# EAGLE board control (EAGLE 9.6.1), part 1 of 2
VERSION: v3.4
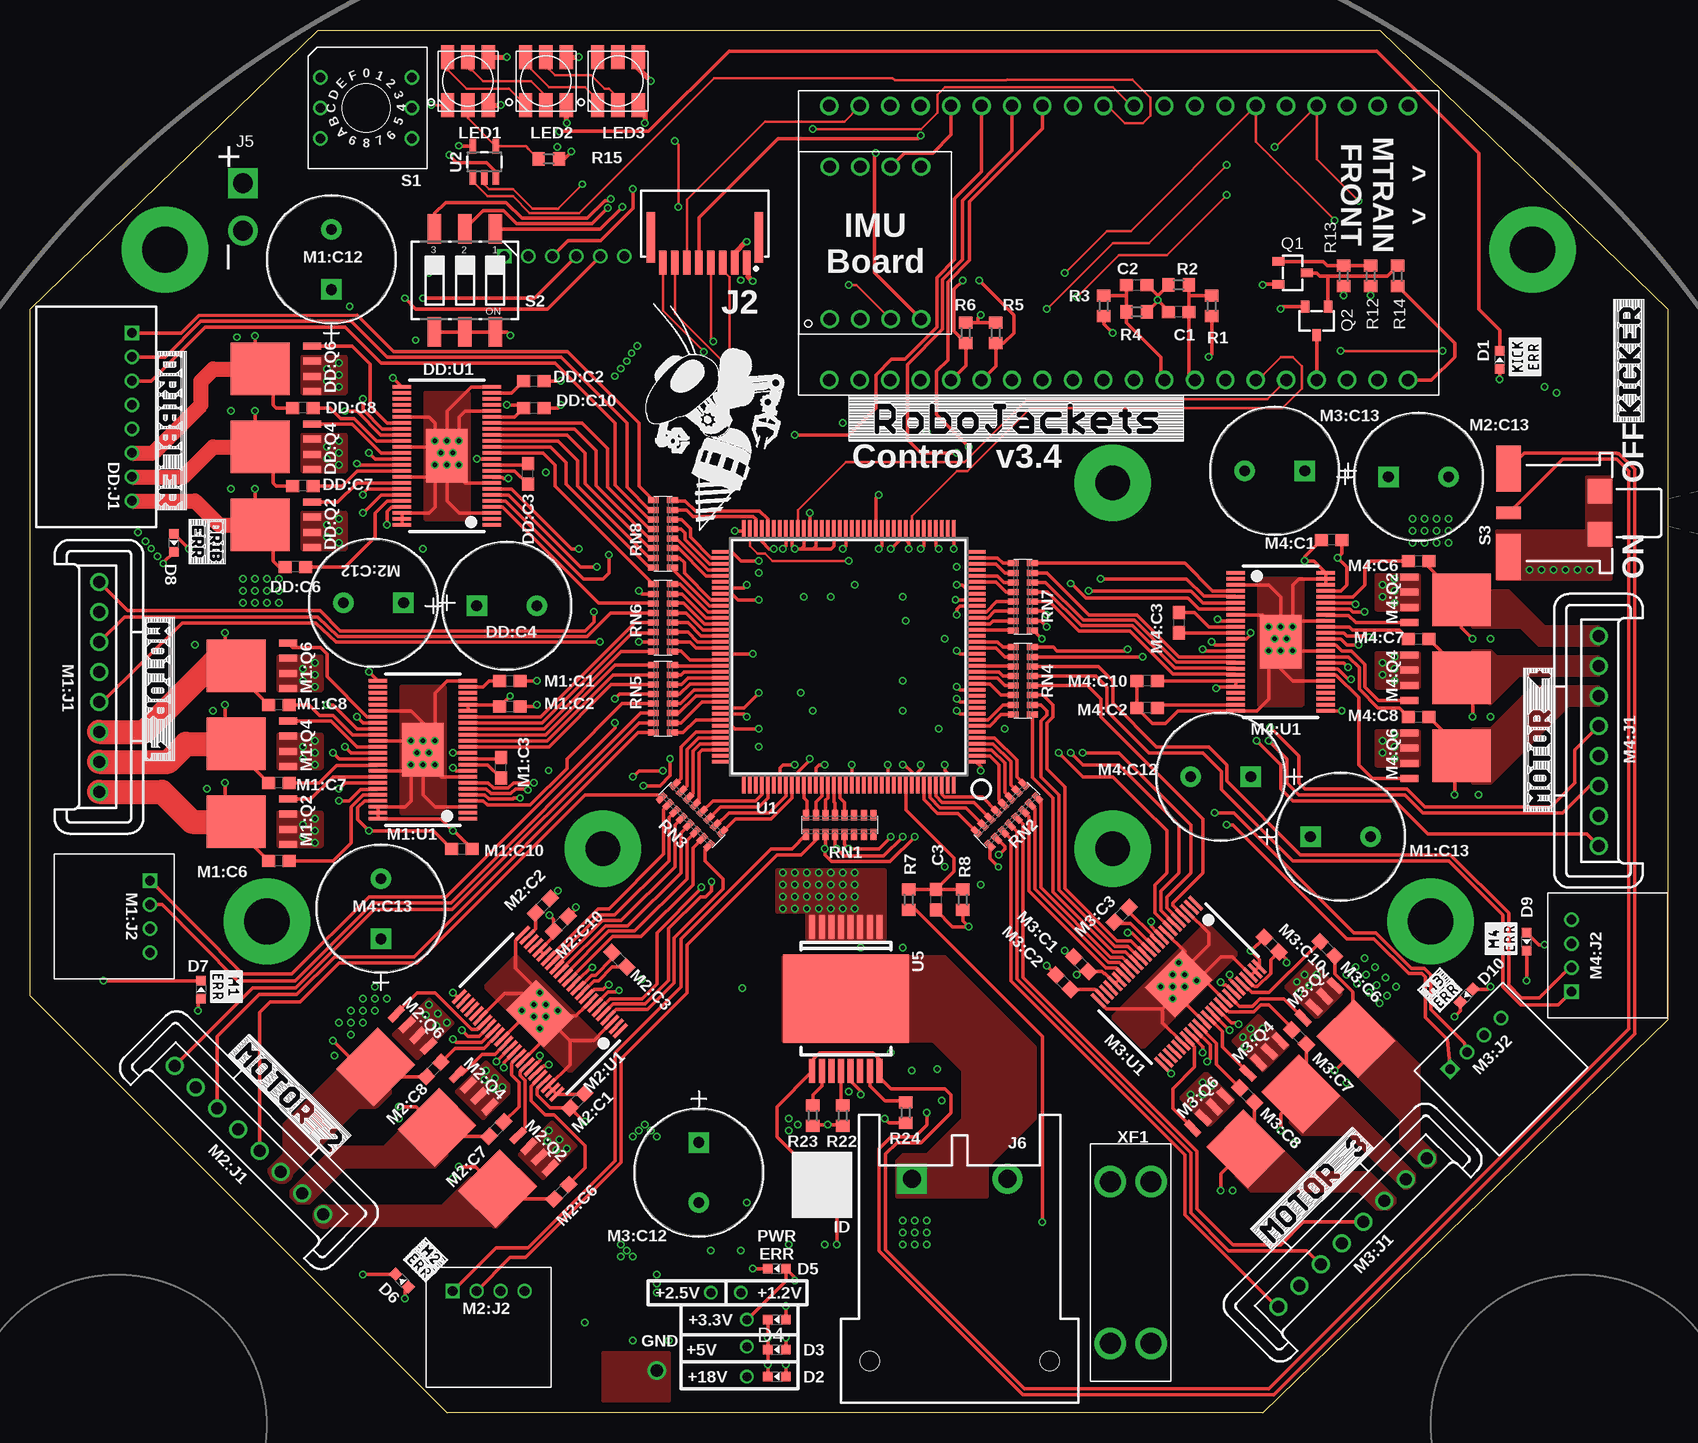
[diagram p0: board, top side]
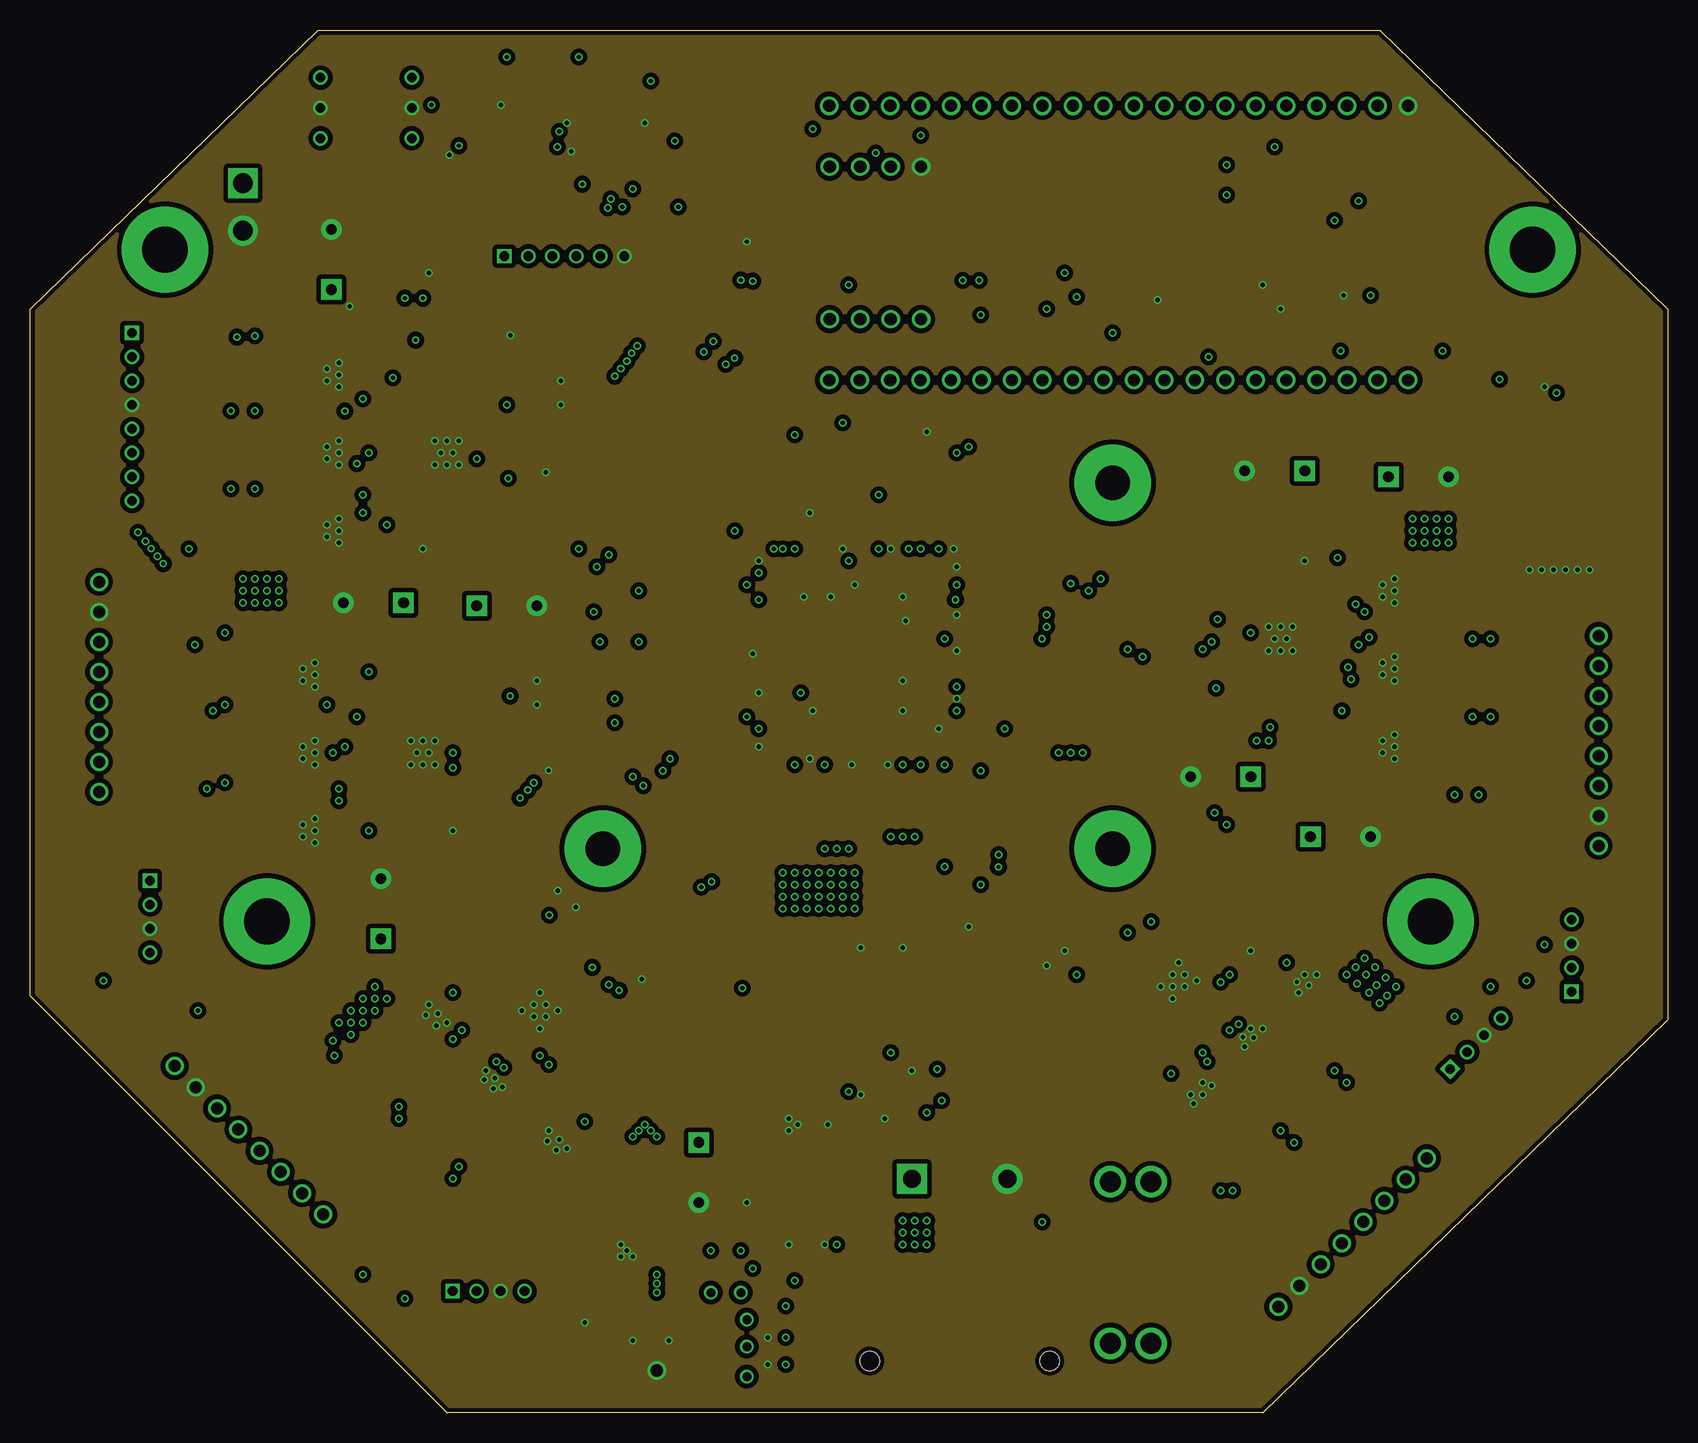
[diagram p1: board, inner layer GND]
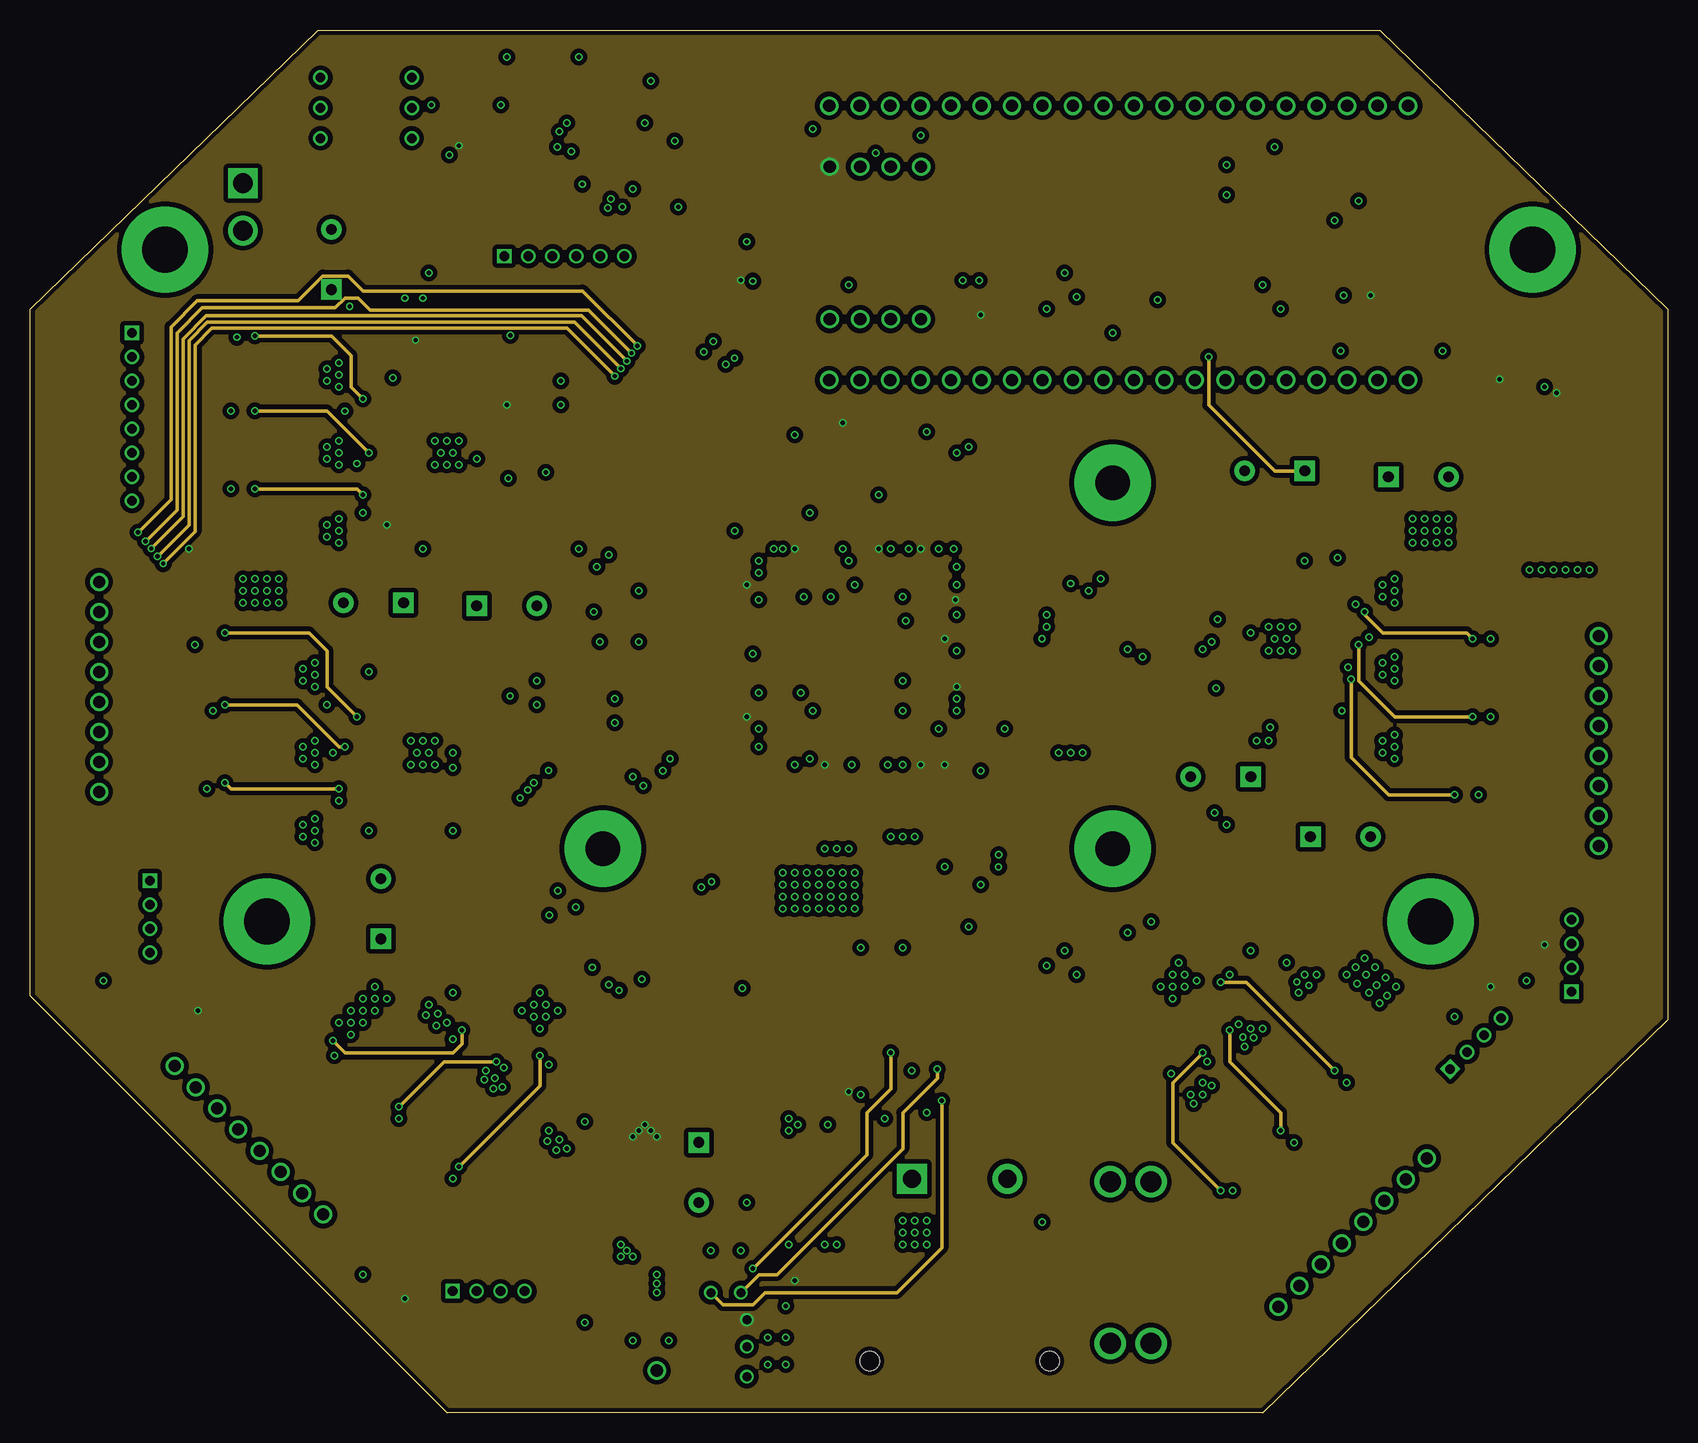
[diagram p2: board, inner layer 3v3]
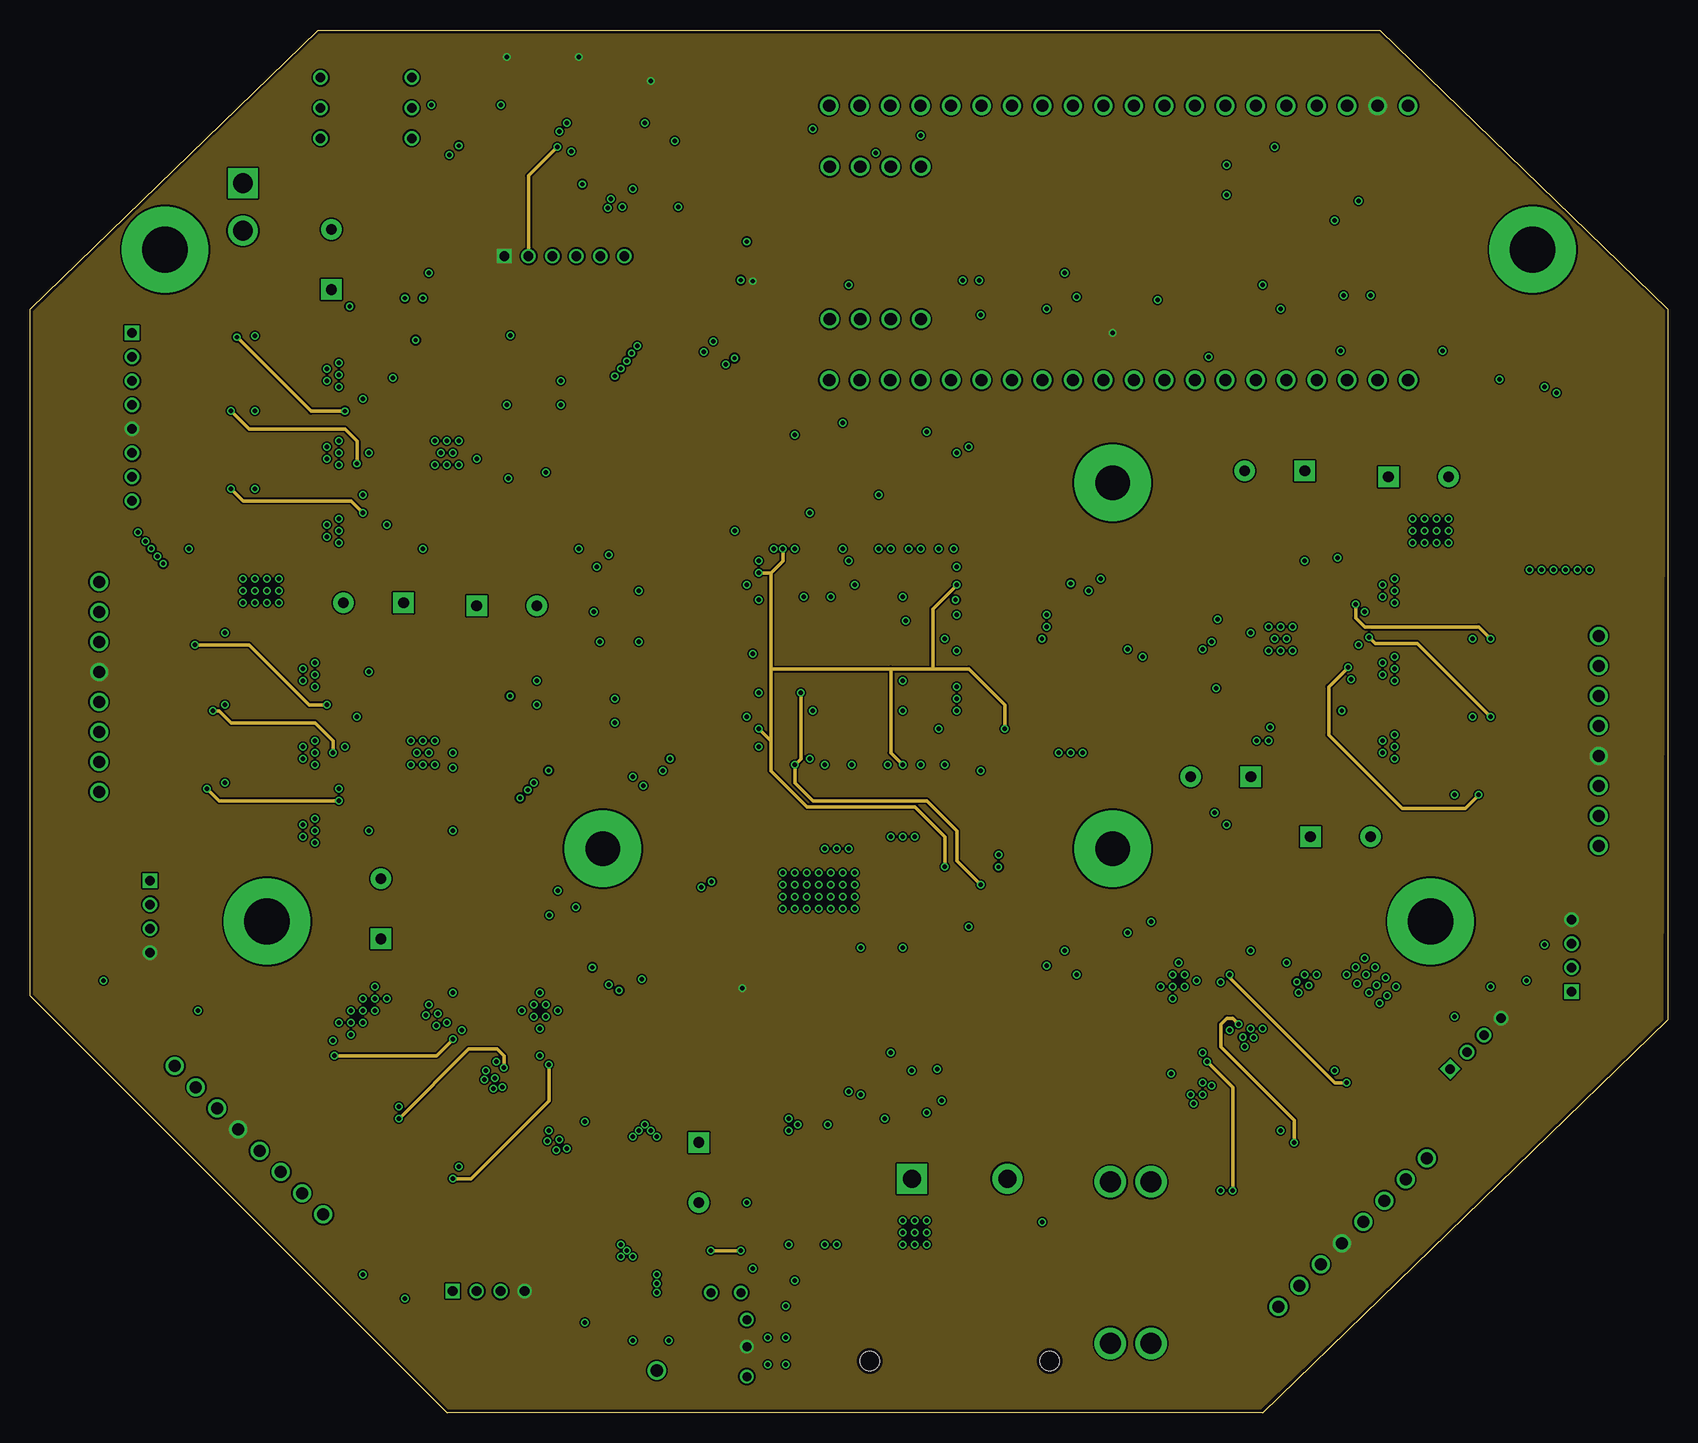
[diagram p3: board, inner layer 5v]
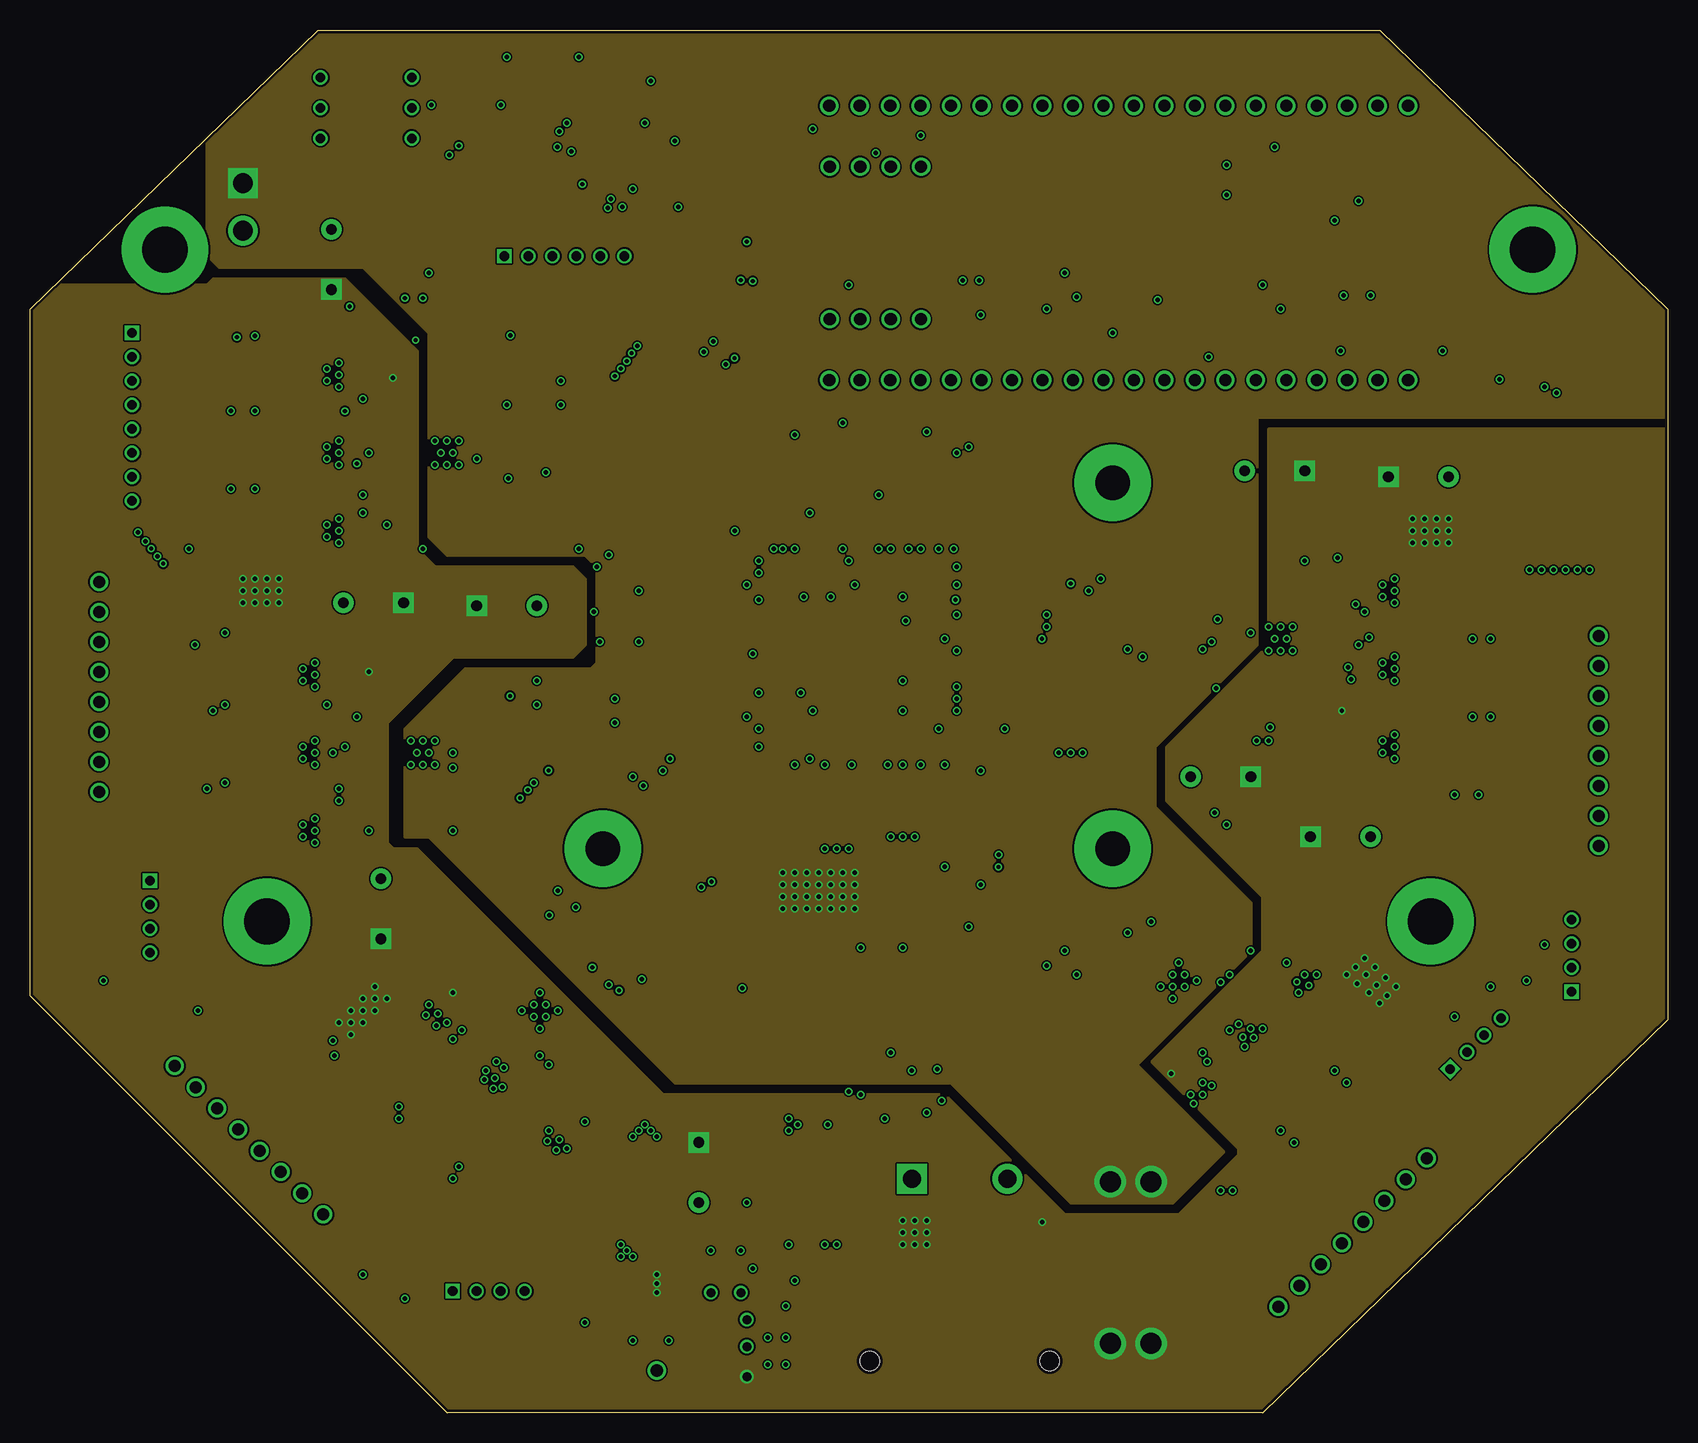
[diagram p4: board, inner layer Vbatt]
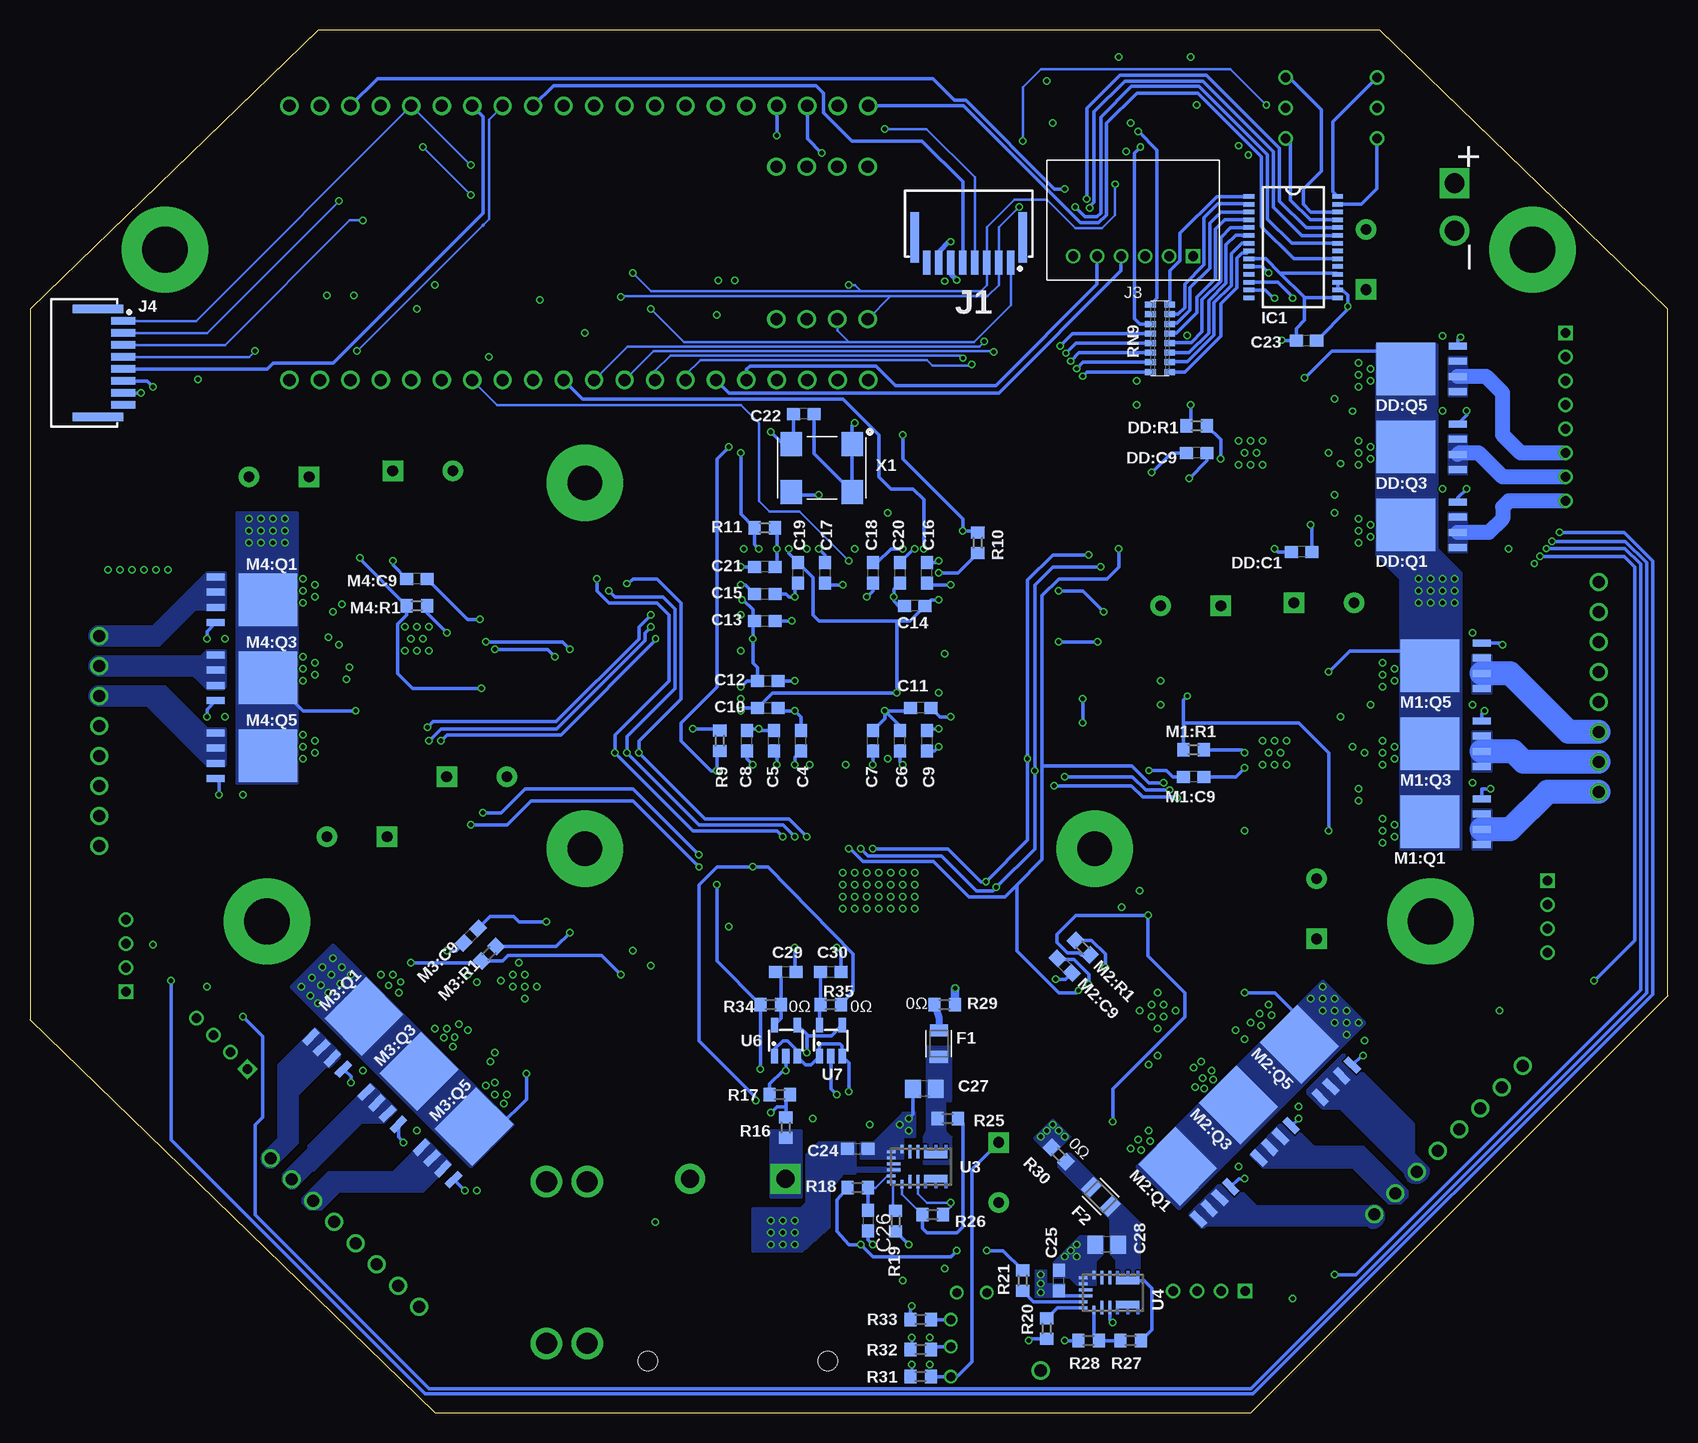
[diagram p5: board, bottom side, seen from below]

Size 136.5 x 115.25 mm. Coordinates in mm from the lower left corner, seen from the top.
Outline: 102.75,0 34.75,0 0,34.75 0,92 24,115.25 112.5,115.25 136.5,92 136.5,32.75 102.75,0
Copper layers (1+2*3+14*15+16): Top 0.018mm / dielectric 0.2mm / GND 0.035mm / dielectric 0.36mm / 3v3 0.035mm / dielectric 0.3mm / 5v 0.035mm / dielectric 0.15mm / Vbatt 0.035mm / dielectric 0.2mm / Bottom 0.018mm
Design rules "eC_6Layer_PClass6_BaseCopperO18-I35_eCDefault *": minimum track width 0.15mm, minimum drill 0.35mm, track to track 0.15mm, track to pad 0.15mm, pad to pad 0.15mm, via to via 0.15mm, smd to smd 0mil, copper to edge 0.25mm, drill to drill 0.35mm, minimum pad ring 0.175mm, minimum via ring 0.125mm, stop-mask expansion 0mil, vias tented up to drill 0.45mm, thermal gap 0.2mm

## Footprints (pad centres in the part's own frame; a part is rotated, then mirrored left to right if it is on the bottom)
C0603 = smd 1.1 x 1: 1 -0.85,0; 2 0.85,0
C0805 = smd 1.3 x 1.5: 1 -0.95,0; 2 0.95,0
CHIP-LED0603 = smd 0.8 x 0.8: A 0,-0.75; C 0,0.75
CAP_PAN_10X12.5 = drill 0.914 pad 1.676 square: 1 -5.004,0 | drill 0.914 pad 1.676: 2 0,0
2MM-8-H = drill 0.8 square: 1 -7,0 | drill 0.8: 2 -5,0; 3 -3,0; 4 -1,0; 5 1,0; 6 3,0; 7 5,0; 8 7,0
PQFN_5X6_E = smd 1.5 x 0.6: 1 -3.02,1.905; 2 -3.02,0.635; 3 -3.02,-0.635; 4 -3.02,-1.905 | smd 4.895 x 4.41: 5678 1.323,0
R0603 = smd 1 x 1.1: 1 -0.85,0; 2 0.85,0
TSSOP-48_PAD = smd 0.3 x 1.55: 1 -5.75,-3.75; 2 -5.25,-3.75; 3 -4.75,-3.75; 4 -4.25,-3.75; 5 -3.75,-3.75; 6 -3.25,-3.75; 7 -2.75,-3.75; 8 -2.25,-3.75; 9 -1.75,-3.75; 10 -1.25,-3.75; 11 -0.75,-3.75; 12 -0.25,-3.75; 13 0.25,-3.75; 14 0.75,-3.75; 15 1.25,-3.75; 16 1.75,-3.75; 17 2.25,-3.75; 18 2.75,-3.75; 19 3.25,-3.75; 20 3.75,-3.75; 21 4.25,-3.75; 22 4.75,-3.75; 23 5.25,-3.75; 24 5.75,-3.75; 25 5.75,3.75; 26 5.25,3.75; 27 4.75,3.75; 28 4.25,3.75; 29 3.75,3.75; 30 3.25,3.75; 31 2.75,3.75; 32 2.25,3.75; 33 1.75,3.75; 34 1.25,3.75; 35 0.75,3.75; 36 0.25,3.75; 37 -0.25,3.75; 38 -0.75,3.75; 39 -1.25,3.75; 40 -1.75,3.75; 41 -2.25,3.75; 42 -2.75,3.75; 43 -3.25,3.75; 44 -3.75,3.75; 45 -4.25,3.75; 46 -4.75,3.75; 47 -5.25,3.75; 48 -5.75,3.75 | smd 4.42 x 3.483: PAD 0,0
FUSC2113X75 = smd 1 x 1.52: 1 -1.1,0 | smd 1 x 1.5: 2 1.1,0
SSOP-28 = smd 0.9 x 0.38: 1 -3.7,4.225; 2 -3.7,3.575; 3 -3.7,2.925; 4 -3.7,2.275; 5 -3.7,1.625; 6 -3.7,0.975; 7 -3.7,0.325; 8 -3.7,-0.325; 9 -3.7,-0.975; 10 -3.7,-1.625; 11 -3.7,-2.275; 12 -3.7,-2.925; 13 -3.7,-3.575; 14 -3.7,-4.225; 15 3.7,-4.225; 16 3.7,-3.575; 17 3.7,-2.925; 18 3.7,-2.275; 19 3.7,-1.625; 20 3.7,-0.975; 21 3.7,-0.325; 22 3.7,0.325; 23 3.7,0.975; 24 3.7,1.625; 25 3.7,2.275; 26 3.7,2.925; 27 3.7,3.575; 28 3.7,4.225
HFW8R-1ST = smd 0.6 x 2: 1 -3.5,3.25; 2 -2.5,3.25; 3 -1.5,3.25; 4 -0.5,3.25; 5 0.5,3.25; 6 1.5,3.25; 7 2.5,3.25; 8 3.5,3.25 | smd 0.7 x 4.2: LEG1 -4.5,1.15; LEG2 4.5,1.15
2MM-6-H = drill 0.8 square: 1 -4,0 | drill 0.8: 2 -2,0; 3 0,0; 4 2,0; 5 4,0; 6 6,0
B2P_SMALL = drill 1.65: 1 0.02,0 | drill 1.65 square: 2 3.98,0
DF22-2-H = drill 1.5 pad 2.5 square: 1 3.96,0 | drill 1.5 pad 2.5: 2 -3.96,0 | hole 1.6: -7.5,15.2; 7.5,15.2
MTRAIN-KIT = drill 1.02: !RST 11.43,16.51; GND -11.43,24.13; NC 11.43,19.05; P$3 -11.43,19.05; P$4 -11.43,16.51; P$5 -11.43,13.97; P$6 -11.43,11.43; P$7 -11.43,8.89; P$8 -11.43,6.35; P$9 -11.43,3.81; P$10 -11.43,1.27; P$11 -11.43,-1.27; P$12 -11.43,-3.81; P$13 -11.43,-6.35; P$14 -11.43,-8.89; P$15 -11.43,-11.43; P$16 -11.43,-13.97; P$17 -11.43,-16.51; P$18 -11.43,-19.05; P$19 -11.43,-21.59; P$20 -11.43,-24.13; P$25 11.43,-13.97; P$26 11.43,-11.43; P$27 11.43,-8.89; P$28 11.43,-6.35; P$29 11.43,-3.81; P$30 11.43,-1.27; P$31 11.43,1.27; P$32 11.43,3.81; P$33 11.43,6.35; P$34 11.43,8.89; P$35 11.43,11.43; P$36 11.43,13.97; RX+ 11.43,-16.51; RX- 11.43,-19.05; TX+ 11.43,-21.59; TX- 11.43,-24.13; VBUS 11.43,21.59; VDD 11.43,24.13; VIN -11.43,21.59
IMU-KIT = drill 1.016: 1 -6.35,3.81; 2 -6.35,1.27; 3 -6.35,-1.27; 4 -6.35,-3.81; 5 6.35,-3.81; 6 6.35,-1.27; 7 6.35,1.27; 8 6.35,3.81
APA102_5050 = smd 2 x 1.1: 1 2,-1.7; 2 2,0; 3 2,1.7; 4 -2,1.7; 5 -2,0; 6 -2,-1.7
MKS-1658 = drill 1 pad 1.422: 1 -8.75,0; 2 -6.25,0; 3 -3.75,0; 4 -1.25,0; 5 1.25,0; 6 3.75,0; 7 6.25,0; 8 8.75,0
2MM-4-H = drill 0.8 square: 1 -3,0 | drill 0.8: 2 -1,0; 3 1,0; 4 3,0
SOT-23-3 = smd 0.7 x 1: 1 -0.95,-1.2; 2 0.95,-1.2; 3 0,1.2
RA-8_2506 = smd 0.5 x 0.9: 1 -2.8,-0.8; 2 -2,-0.8; 3 -1.2,-0.8; 4 -0.4,-0.8; 5 0.4,-0.8; 6 1.2,-0.8; 7 2,-0.8; 8 2.8,-0.8; 9 2.8,0.8; 10 2,0.8; 11 1.2,0.8; 12 0.4,0.8; 13 -0.4,0.8; 14 -1.2,0.8; 15 -2,0.8; 16 -2.8,0.8
HEX = drill 0.8: 1 -2.54,-2.54; 2 2.54,5.08; 4 2.54,-2.54; 8 -2.54,5.08; C1 0,-2.54; C2 0,5.08
CTS-219-03 = smd 1.13 x 2.44: 1 -2.54,-4.3; 2 0,-4.3; 3 2.54,-4.3; 4 2.54,4.3; 5 0,4.3; 6 -2.54,4.3
34EWMSP12M6RT = smd 3.81 x 2.03: 1 -3.685,0; 3 3.685,0 | smd 1.02 x 2.03: 2 0,0 | smd 2.03 x 2.03: LEG1 -1.78,7.62; LEG3 1.78,7.62
TQFP144 = smd 0.3 x 1.6: 1 -8.75,-10.6; 2 -8.25,-10.6; 3 -7.75,-10.6; 4 -7.25,-10.6; 5 -6.75,-10.6; 6 -6.25,-10.6; 7 -5.75,-10.6; 8 -5.25,-10.6; 9 -4.75,-10.6; 10 -4.25,-10.6; 11 -3.75,-10.6; 12 -3.25,-10.6; 13 -2.75,-10.6; 14 -2.25,-10.6; 15 -1.75,-10.6; 16 -1.25,-10.6; 17 -0.75,-10.6; 18 -0.25,-10.6; 19 0.25,-10.6; 20 0.75,-10.6; 21 1.25,-10.6; 22 1.75,-10.6; 23 2.25,-10.6; 24 2.75,-10.6; 25 3.25,-10.6; 26 3.75,-10.6; 27 4.25,-10.6; 28 4.75,-10.6; 29 5.25,-10.6; 30 5.75,-10.6; 31 6.25,-10.6; 32 6.75,-10.6; 33 7.25,-10.6; 34 7.75,-10.6; 35 8.25,-10.6; 36 8.75,-10.6; 73 8.75,10.6; 74 8.25,10.6; 75 7.75,10.6; 76 7.25,10.6; 77 6.75,10.6; 78 6.25,10.6; 79 5.75,10.6; 80 5.25,10.6; 81 4.75,10.6; 82 4.25,10.6; 83 3.75,10.6; 84 3.25,10.6; 85 2.75,10.6; 86 2.25,10.6; 87 1.75,10.6; 88 1.25,10.6; 89 0.75,10.6; 90 0.25,10.6; 91 -0.25,10.6; 92 -0.75,10.6; 93 -1.25,10.6; 94 -1.75,10.6; 95 -2.25,10.6; 96 -2.75,10.6; 97 -3.25,10.6; 98 -3.75,10.6; 99 -4.25,10.6; 100 -4.75,10.6; 101 -5.25,10.6; 102 -5.75,10.6; 103 -6.25,10.6; 104 -6.75,10.6; 105 -7.25,10.6; 106 -7.75,10.6; 107 -8.25,10.6; 108 -8.75,10.6 | smd 1.6 x 0.3: 37 10.6,-8.75; 38 10.6,-8.25; 39 10.6,-7.75; 40 10.6,-7.25; 41 10.6,-6.75; 42 10.6,-6.25; 43 10.6,-5.75; 44 10.6,-5.25; 45 10.6,-4.75; 46 10.6,-4.25; 47 10.6,-3.75; 48 10.6,-3.25; 49 10.6,-2.75; 50 10.6,-2.25; 51 10.6,-1.75; 52 10.6,-1.25; 53 10.6,-0.75; 54 10.6,-0.25; 55 10.6,0.25; 56 10.6,0.75; 57 10.6,1.25; 58 10.6,1.75; 59 10.6,2.25; 60 10.6,2.75; 61 10.6,3.25; 62 10.6,3.75; 63 10.6,4.25; 64 10.6,4.75; 65 10.6,5.25; 66 10.6,5.75; 67 10.6,6.25; 68 10.6,6.75; 69 10.6,7.25; 70 10.6,7.75; 71 10.6,8.25; 72 10.6,8.75; 109 -10.6,8.75; 110 -10.6,8.25; 111 -10.6,7.75; 112 -10.6,7.25; 113 -10.6,6.75; 114 -10.6,6.25; 115 -10.6,5.75; 116 -10.6,5.25; 117 -10.6,4.75; 118 -10.6,4.25; 119 -10.6,3.75; 120 -10.6,3.25; 121 -10.6,2.75; 122 -10.6,2.25; 123 -10.6,1.75; 124 -10.6,1.25; 125 -10.6,0.75; 126 -10.6,0.25; 127 -10.6,-0.25; 128 -10.6,-0.75; 129 -10.6,-1.25; 130 -10.6,-1.75; 131 -10.6,-2.25; 132 -10.6,-2.75; 133 -10.6,-3.25; 134 -10.6,-3.75; 135 -10.6,-4.25; 136 -10.6,-4.75; 137 -10.6,-5.25; 138 -10.6,-5.75; 139 -10.6,-6.25; 140 -10.6,-6.75; 141 -10.6,-7.25; 142 -10.6,-7.75; 143 -10.6,-8.25; 144 -10.6,-8.75
SOT23-5 = smd 0.55 x 1.2: 1 -0.95,-1.3; 2 0,-1.3; 3 0.95,-1.3; 4 0.95,1.3; 5 -0.95,1.3
MPM3620GQV-P = smd 0.7 x 0.25: 1 -1.45,1.55; 12 1.45,1.55 | smd 1.1 x 0.25: 2 -1.25,0.9; 3 -1.25,0.25; 10 1.25,0.25; 11 1.25,0.9 | smd 0.25 x 0.7: 13 1.25,2.45; 14 0.75,2.45; 17 -0.75,2.45; 18 -1.25,2.45 | smd 0.25 x 1.1: 15 0.25,2.25; 16 -0.25,2.25 | smd 0.6 x 1.95: 456 -1,-1.25; 789 1,-1.25
POWERSO-16 = smd 0.5 x 2: 1 -2.8,-6; 2 -2,-6; 3 -1.2,-6; 4 -0.4,-6; 5 0.4,-6; 6 1.2,-6; 7 2,-6; 8 2.8,-6; 9 2.8,6; 10 2,6; 11 1.2,6; 12 0.4,6; 13 -0.4,6; 14 -1.2,6; 15 -2,6; 16 -2.8,6 | smd 10.5 x 7.4: 17 0,0
SOT-23-5 = smd 0.6 x 1.2: 1 -0.95,-1.306; 2 0,-1.306; 3 0.95,-1.306; 4 0.95,1.306; 5 -0.95,1.306
ASV = smd 1.8 x 2: 1 -2.54,-2; 2 2.54,-2; 3 2.54,2; 4 -2.54,2
3557-2 = drill 1.75: 1 -6.735,1.7; 2 -6.735,-1.7; 3 6.735,-1.7; 4 6.735,1.7

## Placement (x,y rotation side)
C1  0.1uF 50V  [C0603]  95.75,91.75 180 top
C2  0.1uF  [C0603]  92.25,94 0 top
C3  0.1uF  [C0603]  75.5,42.75 270 top
C4  0.1uF  [C0603]  72.25,56 90 bottom
C5  0.1uF  [C0603]  74.5,56 90 bottom
C6  0.1uF  [C0603]  64,56 90 bottom
C7  0.1uF  [C0603]  66.25,56 90 bottom
C8  0.1uF  [C0603]  76.75,56 90 bottom
C9  0.1uF  [C0603]  61.75,56 270 bottom
C10  0.1uF  [C0603]  75,58.75 0 bottom
C11  0.1uF  [C0603]  62.25,58.75 180 bottom
C12  0.1uF  [C0603]  75,61 0 bottom
C13  0.1uF  [C0603]  75.25,66 0 bottom
C14  0.1uF  [C0603]  62.75,67.25 180 bottom
C15  0.1uF  [C0603]  75.25,68.25 0 bottom
C16  0.1uF  [C0603]  61.75,70 90 bottom
C17  0.1uF  [C0603]  70.25,70 270 bottom
C18  0.1uF  [C0603]  66.25,70 270 bottom
C19  0.1uF  [C0603]  72.5,70 270 bottom
C20  0.1uF  [C0603]  64,70 270 bottom
C21  0.1uF  [C0603]  75.25,70.5 180 bottom
C22  0.1uF  [C0603]  72,83.25 180 bottom
C23  0.1uF  [C0603]  30.1,89.38 0 bottom
C24  GRM188R6YA106MA73D  [C0603]  67.5,22 0 bottom
C25  GRM188R6YA106MA73D  [C0603]  50.75,11 90 bottom
C26  2.2uF 50V  [C0603]  66.65,16 270 bottom
C27  22uF 16V  [C0805]  61.95,27 180 bottom
C28  22uF 16V  [C0805]  46.75,14 180 bottom
C29  2.2uF 50V  [C0603]  73.5,36.75 0 bottom
C30  1uF  [C0603]  69.75,36.75 0 bottom
D1  RED  [CHIP-LED0603]  122.5,87.75 0 top
D2  GREEN  [CHIP-LED0603]  62.25,3 90 top
D3  GREEN  [CHIP-LED0603]  62.25,5.25 90 top
D4  GREEN  [CHIP-LED0603]  62.25,7.75 90 top
D5  RED  [CHIP-LED0603]  62.25,12 90 top
D6  RED  [CHIP-LED0603]  31,11 45 top
D7  RED  [CHIP-LED0603]  14.25,35.25 0 top
D8  RED  [CHIP-LED0603]  12,72.5 180 top
D9  RED  [CHIP-LED0603]  124.75,39.25 180 top
D10  RED  [CHIP-LED0603]  119.75,34.75 136 top
DD:C1  1uF  [C0603]  30.5,71.75 180 bottom
DD:C2  1uF  [C0603]  42,86 0 top
DD:C3  0.022uF 50V  [C0603]  41.5,78.25 90 top
DD:C4  ECA-1HHG221  [CAP_PAN_10X12.5]  42.25,67.25 0 top
DD:C6  0.1uF 50V  [C0603]  22.12,70.5 180 top
DD:C7  0.1uF 50V  [C0603]  22.75,77.25 180 top
DD:C8  0.1uF 50V  [C0603]  22.75,83.75 180 top
DD:C9  2.2uF 50V  [C0603]  39.25,80 180 bottom
DD:C10  0.1uF 50V  [C0603]  42,83.75 0 top
DD:J1  8-PIN_2MM-H  [2MM-8-H]  8.5,83 270 top
DD:Q1  IRFH7545  [PQFN_5X6_E]  20.5,74 180 bottom
DD:Q2  IRFH7545  [PQFN_5X6_E]  20.5,74 180 top
DD:Q3  IRFH7545  [PQFN_5X6_E]  20.5,80.5 180 bottom
DD:Q4  IRFH7545  [PQFN_5X6_E]  20.5,80.5 180 top
DD:Q5  IRFH7545  [PQFN_5X6_E]  20.5,87 180 bottom
DD:Q6  IRFH7545  [PQFN_5X6_E]  20.5,87 180 top
DD:R1  10k  [R0603]  39.25,82.25 0 bottom
DD:U1  DRV8303DCA  [TSSOP-48_PAD]  34.75,79.75 90 top
F1  0805L200SLTHYR  [FUSC2113X75]  60.75,30.75 90 bottom
F2  0805L200SLTHYR  [FUSC2113X75]  47.25,18 135 bottom
IC1  MCP23017-E/SS  [SSOP-28]  31.2,97.15 0 bottom
J1  HFW8R-1ST  [HFW8R-1ST]  58.25,99.1 180 bottom
J2  HFW8R-1ST  [HFW8R-1ST]  56.25,99.1 180 top
J3  6-PIN_2MM-H  [2MM-6-H]  43.55,96.4 180 bottom
J4  HFW8R-1ST  [HFW8R-1ST]  132,87.5 270 bottom
J5  2-PIN-KICKERS  [B2P_SMALL]  17.75,98.5 90 top
J6  DF22-2  [DF22-2-H]  77.5,19.5 180 top
KIT1  MTRAIN  [MTRAIN-KIT]  90.75,97.5 270 top
KIT2  IMUIMU-KIT  [IMU-KIT]  70.47,97.5 90 top
LED1  APA102C-5050  [APA102_5050]  36.5,111 90 top
LED2  APA102C-5050  [APA102_5050]  43,111 90 top
LED3  APA102C-5050  [APA102_5050]  49,111 90 top
M1:C1  1uF  [C0603]  40,58.88 0 top
M1:C2  1uF  [C0603]  40,61 0 top
M1:C3  0.022uF 50V  [C0603]  39.25,53.75 90 top
M1:C6  0.1uF 50V  [C0603]  20.75,46 180 top
M1:C7  0.1uF 50V  [C0603]  20.75,52.5 180 top
M1:C8  0.1uF 50V  [C0603]  20.75,59 180 top
M1:C9  2.2uF 50V  [C0603]  39.5,53 180 bottom
M1:C10  0.1uF 50V  [C0603]  36,47 0 top
M1:C12  ECA-1HHG221  [CAP_PAN_10X12.5]  25.12,98.62 90 top
M1:C13  ECA-1HHG221  [CAP_PAN_10X12.5]  111.75,48 0 top
M1:J1  MKS-1658  [MKS-1658]  5.75,60.5 270 top
M1:J2  4-PIN_2MM-H  [2MM-4-H]  10,41.35 270 top
M1:Q1  IRFH7545  [PQFN_5X6_E]  18.5,49.25 180 bottom
M1:Q2  IRFH7545  [PQFN_5X6_E]  18.5,49.25 180 top
M1:Q3  IRFH7545  [PQFN_5X6_E]  18.5,55.75 180 bottom
M1:Q4  IRFH7545  [PQFN_5X6_E]  18.5,55.75 180 top
M1:Q5  IRFH7545  [PQFN_5X6_E]  18.5,62.25 180 bottom
M1:Q6  IRFH7545  [PQFN_5X6_E]  18.5,62.25 180 top
M1:R1  10k  [R0603]  39.5,55.25 0 bottom
M1:U1  DRV8303DCA  [TSSOP-48_PAD]  32.75,55.25 90 top
M2:C1  1uF  [C0603]  45.62,26 45 top
M2:C2  1uF  [C0603]  42.75,42.25 45 top
M2:C3  0.022uF 50V  [C0603]  49.12,37.75 135 top
M2:C6  0.1uF 50V  [C0603]  44.3,18.4 225 top
M2:C7  0.1uF 50V  [C0603]  38.88,23.62 225 top
M2:C8  0.1uF 50V  [C0603]  33.65,28.6 225 top
M2:C9  2.2uF 50V  [C0603]  50.25,37.25 315 bottom
M2:C10  0.1uF 50V  [C0603]  44.25,40.75 45 top
M2:C12  ECA-1HHG221  [CAP_PAN_10X12.5]  26.12,67.5 180 top
M2:C13  ECA-1HHG221  [CAP_PAN_10X12.5]  118.25,78 0 top
M2:J1  MKS-1658  [MKS-1658]  18.25,22.7 315 top
M2:J2  4-PIN_2MM-H  [2MM-4-H]  38.23,10.12 0 top
M2:Q1  IRFH7545  [PQFN_5X6_E]  39.9,19.6 135 bottom
M2:Q2  IRFH7545  [PQFN_5X6_E]  39.9,19.6 225 top
M2:Q3  IRFH7545  [PQFN_5X6_E]  34.85,24.7 135 bottom
M2:Q4  IRFH7545  [PQFN_5X6_E]  34.85,24.7 225 top
M2:Q5  IRFH7545  [PQFN_5X6_E]  29.75,29.75 135 bottom
M2:Q6  IRFH7545  [PQFN_5X6_E]  29.75,29.75 225 top
M2:R1  10k  [R0603]  48.75,38.75 135 bottom
M2:U1  DRV8303DCA  [TSSOP-48_PAD]  42.5,33.25 135 top
M3:C1  1uF  [C0603]  87.62,37.38 135 top
M3:C2  1uF  [C0603]  86.12,35.88 135 top
M3:C3  0.022uF 50V  [C0603]  91,41.5 225 top
M3:C6  0.1uF 50V  [C0603]  108.15,38.65 315 top
M3:C7  0.1uF 50V  [C0603]  105.8,31.3 315 top
M3:C8  0.1uF 50V  [C0603]  101.45,26.45 315 top
M3:C9  2.2uF 50V  [C0603]  99.75,39.75 225 bottom
M3:C10  0.1uF 50V  [C0603]  103.5,39 135 top
M3:C12  ECA-1HHG221  [CAP_PAN_10X12.5]  55.75,17.5 270 top
M3:C13  ECA-1HHG221  [CAP_PAN_10X12.5]  101.25,78.5 180 top
M3:J1  MKS-1658  [MKS-1658]  110.25,15 45 top
M3:J2  4-PIN_2MM-H  [2MM-4-H]  120.5,30.75 45 top
M3:Q1  IRFH7545  [PQFN_5X6_E]  109.6,32.1 45 bottom
M3:Q2  IRFH7545  [PQFN_5X6_E]  109.6,32.1 315 top
M3:Q3  IRFH7545  [PQFN_5X6_E]  105,27.5 45 bottom
M3:Q4  IRFH7545  [PQFN_5X6_E]  105,27.5 315 top
M3:Q5  IRFH7545  [PQFN_5X6_E]  100.4,22.9 45 bottom
M3:Q6  IRFH7545  [PQFN_5X6_E]  100.4,22.9 315 top
M3:R1  10k  [R0603]  98.25,38.25 45 bottom
M3:U1  DRV8303DCA  [TSSOP-48_PAD]  95.75,35.75 225 top
M4:C1  1uF  [C0603]  108.5,72.75 180 top
M4:C2  1uF  [C0603]  93.12,58.75 180 top
M4:C3  0.022uF 50V  [C0603]  95.75,65.85 270 top
M4:C6  0.1uF 50V  [C0603]  115.75,71 0 top
M4:C7  0.1uF 50V  [C0603]  115.75,64.5 0 top
M4:C8  0.1uF 50V  [C0603]  115.75,58 0 top
M4:C9  2.2uF 50V  [C0603]  104.25,69.5 180 bottom
M4:C10  0.1uF 50V  [C0603]  93.12,61 180 top
M4:C12  ECA-1HHG221  [CAP_PAN_10X12.5]  96.75,53 180 top
M4:C13  ECA-1HHG221  [CAP_PAN_10X12.5]  29.25,44.5 90 top
M4:J1  MKS-1658  [MKS-1658]  130.75,56 90 top
M4:J2  4-PIN_2MM-H  [2MM-4-H]  128.5,38.1 90 top
M4:Q1  IRFH7545  [PQFN_5X6_E]  118,67.75 0 bottom
M4:Q2  IRFH7545  [PQFN_5X6_E]  118,67.75 0 top
M4:Q3  IRFH7545  [PQFN_5X6_E]  118,61.25 0 bottom
M4:Q4  IRFH7545  [PQFN_5X6_E]  118,61.25 0 top
M4:Q5  IRFH7545  [PQFN_5X6_E]  118,54.75 0 bottom
M4:Q6  IRFH7545  [PQFN_5X6_E]  118,54.75 0 top
M4:R1  10k  [R0603]  104.25,67.25 0 bottom
M4:U1  DRV8303DCA  [TSSOP-48_PAD]  104.25,64.25 270 top
Q1  BSS806NH6327XTSA1  [SOT-23-3]  105.25,95 270 top
Q2  BSS806NH6327XTSA1  [SOT-23-3]  107.25,91 180 top
R1  68k 1%  [R0603]  98.5,92.25 90 top
R2  10k 1%  [R0603]  95.75,94 180 top
R3  10k 1%  [R0603]  89.5,92.25 90 top
R4  10k 1%  [R0603]  92.25,91.75 0 top
R5  4.7k  [R0603]  80.5,90 90 top
R6  4.7k  [R0603]  78,90 90 top
R7  68k  [R0603]  73.25,42.75 90 top
R8  10k  [R0603]  77.75,42.75 270 top
R9  4.7k  [R0603]  79,56 90 bottom
R10  330  [R0603]  57.5,72.5 270 bottom
R11  4.7k  [R0603]  75.25,73.75 180 bottom
R12  10k  [R0603]  111.75,94.75 270 top
R13  100k  [R0603]  109.5,94.75 90 top
R14  100k  [R0603]  114,94.75 270 top
R15  50k  [R0603]  43.25,104.5 180 top
R16  270k  [R0603]  73.5,23.75 270 bottom
R17  100k  [R0603]  74,26.5 0 bottom
R18  150k  [R0603]  67.5,18.75 0 bottom
R19  43.2k  [R0603]  64.35,15.95 90 bottom
R20  29.4k  [R0603]  51.75,7 90 bottom
R21  150k  [R0603]  53.75,11 270 bottom
R22  10k  [R0603]  67.75,24.75 90 top
R23  1k  [R0603]  65.25,24.75 90 top
R24  1k  [R0603]  73,25 90 top
R25  160k 1%  [R0603]  60,24.5 180 bottom
R26  30.1k 1%  [R0603]  61.25,16.5 180 bottom
R27  160k 1%  [R0603]  44.75,6 0 bottom
R28  51.0k 1%  [R0603]  48.25,6 0 bottom
R29  0  [R0603]  60.25,34 0 bottom
R30  0  [R0603]  50.75,21.5 135 bottom
R31  1k  [R0603]  62.25,3 0 bottom
R32  1k  [R0603]  62.25,5.25 180 bottom
R33  1k  [R0603]  62.25,7.75 180 bottom
R34  0  [R0603]  74.75,34 180 bottom
R35  0  [R0603]  69.75,34 0 bottom
RN1  330  [RA-8_2506]  67.5,49 180 top
RN2  330  [RA-8_2506]  81.43,49.82 225 top
RN3  330  [RA-8_2506]  55.18,49.82 135 top
RN4  330  [RA-8_2506]  82.75,61 270 top
RN5  330  [RA-8_2506]  52.75,59.5 90 top
RN6  330  [RA-8_2506]  52.75,66.25 90 top
RN7  330  [RA-8_2506]  82.75,68 270 top
RN8  330  [RA-8_2506]  52.75,73.25 90 top
RN9  330  [RA-8_2506]  42.3,89.55 90 bottom
S1  94HCB16T  [HEX]  26.75,108.75 270 top
S2  219-03  [CTS-219-03]  36.25,94.38 180 top
S3  34EWMSP12M6RT  [34EWMSP12M6RT]  123.25,75 270 top
U1  XC3S250E-4TQG144C  [TQFP144]  68.25,63 90 top
U2  SN74AHC1G125  [SOT23-5]  37.88,104.25 0 top
U3  MPM3620GQV-P  [MPM3620GQV-P]  62.25,20.5 90 bottom
U4  MPM3620GQV-P  [MPM3620GQV-P]  46.25,10 90 bottom
U5  VND5E006ASPTR-E  [POWERSO-16]  68,34.5 180 top
U6  MCP1824T-1202E/OT  [SOT-23-5]  73.5,31 0 bottom
U7  MCP1824T-2502E/OT  [SOT-23-5]  69.75,31 0 bottom
U$1  [ERR-DRIB]  13.25,74.5 270 top
U$2  [ROBOJACKETS]  68.25,80.96 0 top
U$3  [MOTOR-1]  9.5,66.31 270 top
U$4  [DRIBBLER]  10.5,88.5 270 top
U$5  [MOTOR-2]  16.5,29.81 315 top
U$6  [MOTOR-3]  103.5,13.56 45 top
U$7  [MOTOR-4]  127,50.06 90 top
U$8  [ERR-M1]  16.75,35.5 270 top
U$9  [KICKER]  134.5,82.56 90 top
U$11  [ROBOBUZZ_1.0X2]  55.75,73.5 0 top
U$12  [ERR-M2]  33.25,13 315 top
U$13  [ERR-M3]  117.25,35.5 45 top
U$14  [ERR-M4]  122.25,39.5 90 top
U$15  [ERR-KICK]  124.25,88 90 top
X1  ASV-18.432MHZ-EJ-T  [ASV]  70.5,78.75 180 bottom
XF1  30A  [3557-2]  91.75,12.5 270 top

## Library data of the parts
C1-C22 C26 C29 C30 = resistor
C23-C25 DD:C1-DD:C3 DD:C6-DD:C10 DD:R1 M1:C1-M1:C3 M1:C6-M1:C10 M1:R1 M2:C1-M2:C3 M2:C6-M2:C10 M2:R1 M3:C1-M3:C3 M3:C6-M3:C10 M3:R1 M4:C1-M4:C3 M4:C6-M4:C10 M4:R1 = rcl
C27 C28 = rcl; SPICEPREFIX: C
D1 D6-D10 = RoboJackets-LEDs; DIGIKEY: 160-1447-1-ND; MPN: LTST-C191KRKT
D2-D4 = RoboJackets-LEDs; DIGIKEY: 160-1446-1-ND; MPN: LTST-C191KGKT
D5 = RoboJackets-LEDs; DIGIKEY: 160-1447-1-ND; MPN: LTST-C191KRKT; VALUE: GREEN
DD:C4 M1:C12 M1:C13 M2:C12 M2:C13 M3:C12 M3:C13 M4:C12 M4:C13 = RoboJackets-Capacitors; DIGIKEY: P5572-ND; MANUFACTURER_PART_NUMBER: ECA-1HHG221
DD:J1 = RoboJackets-Connectors; DIGIKEY: WM18937-ND; MPN: 0353630860
DD:Q1-DD:Q6 M1:Q1-M1:Q6 M2:Q1-M2:Q6 M3:Q1-M3:Q6 M4:Q1-M4:Q6 = RoboJackets-Discrete; DIGIKEY: IRFH7545TRPBFCT-ND; MPN: IRFH7545TRPBF
DD:U1 M1:U1 M2:U1 M3:U1 M4:U1 = RoboJackets-PowerICs; DIGIKEY: 296-40070-1-ND; MPN: DRV8303DCAR
F1 F2 = RoboJackets-Fuses
IC1 = RoboJackets-ICs; DIGIKEY: MCP23017-E/SS-ND; MPN: MCP23017-E/SS
J1 J2 J4 = RoboJackets-Connectors; DIGIKEY: 609-1788-1-ND; MPN: HFW8R-1STE1LF
J3 = RoboJackets-Connectors; PINS: 6; PIN_PITCH: 2.0 mm
J5 = RoboJackets-Connectors; DIGIKEY: 455-1648-ND; MPN: B2PS-VH(LF)(SN)
J6 = RoboJackets-Connectors; DIGIKEY: H125155-ND; MPN: DF22-2P-7.92DS(35)
KIT1 KIT2 = RoboJackets-Boards
LED1-LED3 = RoboJackets-ICs; DIGIKEY: 1568-1902-ND; MPN: APA1025050
M1:J1 M2:J1 M3:J1 M4:J1 = RoboJackets-Connectors; MPN: MKS 1658-6-0-808
M1:J2 M2:J2 M3:J2 M4:J2 = RoboJackets-Connectors; DIGIKEY: WM18933-ND; MPN: 0353630460
Q1 Q2 = RoboJackets-Discrete
R1-R35 = rcl; SPICEPREFIX: R
RN1-RN9 = RoboJackets-Resistors; DIGIKEY: 742C163331JPCT-ND; MPN: 742C163331JP
S1 = RoboJackets-Switches; DIGIKEY: GH7372-ND; MPN: 94HCB16T
S2 = switch-dil; DIGIKEY: CT2193MST-ND; MPN: 219-3MST; OC_FARNELL: unknown; OC_NEWARK: unknown
S3 = RoboJackets-Switches; DIGIKEY: GH7540CT-ND; MPN: 34EWMSP12M6RT
U1 = RoboJackets-ICs; DIGIKEY: 122-1524-ND; MPN: XC3S250E-4TQG144C
U2 = SparkFun-IC-Logic; PROD_ID: IC-11920
U3 U4 = RoboJackets-PowerICs; DIGIKEY: 1589-1252-1-ND; MPN: MPM3620GQV-P
U5 = RoboJackets-PowerICs; DIGIKEY: 497-11623-1-ND; MPN: VND5E006ASPTR-E
U6 = RoboJackets-PowerICs; DIGIKEY: MCP1824T-1202E/OTCT-ND; MPN: MCP1824T-1202E/OT; VOLTAGE: 1.2V
U7 = RoboJackets-PowerICs; DIGIKEY: MCP1824T-2502E/OTCT-ND; MPN: MCP1824T-2502E/OT; VOLTAGE: 2.5V
U$1-U$9 U$11-U$15 = RoboJackets-Aesthetics
X1 = RoboJackets-FreqGen; DIGIKEY: 535-9314-1-ND; MPN: ASV-18.432MHZ-EJ-T
XF1 = RoboJackets-Fuses; DIGIKEY: 36-3557-2-ND; MPN: 3557-2

## Nets
5V-LED: D3.A R32.2
5V-LED1: D4.A R33.2
18.5V-LED: D2.A R31.1
!CS!-DOT: KIT1.P$11 U2.1
!CS!-FPGA: KIT1.P$31 U1.69
!CS!-ICM: KIT1.P$18 KIT2.4
!CS!-IR: J1.4 KIT1.P$10
!CS!-KICK: J4.4 KIT1.P$8
!CS!-RAD0: J2.5 KIT1.P$17
!RST!-I2C: J3.2 RN9.11
!RST!-IR: J1.5 KIT1.P$9
!RST!-KICK: J4.5 KIT1.P$7
!RST!-NETWORK: KIT1.!RST Q2.3
!RST!-RADIO: J2.6 KIT1.P$19
!RST!_CTRL: Q1.3 Q2.1 R14.1
+1.2V: C6.1 C10.1 C14.1 C19.1 R34.2 U1.9 U1.45 U1.80 U1.115
+1.2V-PRE: C29.1 R34.1 U6.5
+2.5V: C4.1 C9.1 C15.1 C20.1 R9.2 R10.2 R35.2 U1.30 U1.65 U1.102 U1.137
+2.5V-PRE: C30.1 R35.1 U7.5
+3.3V: C5.1 C7.1 C8.1 C11.1 C12.1 C13.1 C16.1 C17.1 C18.1 C21.1 C22.1 C23.1 D1.A D5.A D6.A D7.A D8.A D9.A D10.A DD:C1.1 DD:C10.1 DD:R1.1 DD:U1.19 DD:U1.45 IC1.9 IC1.15 IC1.18 J1.6 J4.7 KIT2.8 R5.2 R6.2 R11.1 R12.2 R30.2 R33.1 U1.13 U1.28 U1.42 U1.49 U1.57 U1.60 U1.62 U1.64 U1.79 U1.100 U1.121 U1.138 U1.143 U2.5 U6.1 U6.3 U7.1 U7.3 X1.1 X1.4
+3.3V-FUSE: C28.1 F2.1 R27.2 U4.789
+5V: DD:J1.5 J2.1 J3.1 KIT1.VIN LED1.1 LED2.1 LED3.1 M1:J1.4 M1:J2.4 M2:J1.4 M2:J2.4 M3:J1.4 M3:J2.4 M4:J1.4 M4:J2.4 R3.1 R29.2 R32.1
+5V-FUSE: C27.1 F1.1 R25.2 U3.789
+18.5V: C24.1 C25.1 DD:C4.1 DD:Q1.5678 DD:Q3.5678 DD:Q5.5678 DD:U1.25 M1:C12.1 M1:C13.1 M1:Q1.5678 M1:Q3.5678 M1:Q5.5678 M1:U1.25 M2:C12.1 M2:C13.1 M2:Q1.5678 M2:Q3.5678 M2:Q5.5678 M2:U1.25 M3:C12.1 M3:C13.1 M3:Q1.5678 M3:Q3.5678 M3:Q5.5678 M3:U1.25 M4:C12.1 M4:C13.1 M4:Q1.5678 M4:Q3.5678 M4:Q5.5678 M4:U1.25 R1.1 R7.1 R31.2 U3.16 U4.16 XF1.3 XF1.4
AAM: R19.2 U3.18
AAM1: R20.2 U4.18
BATT-FPGA: C3.1 R7.2 R8.1 U1.136
BATT_PWR_AVAIL: Q1.1 R12.1 R13.2
CS1: R23.2 U5.10
CS2: R24.2 U5.15
CS-DIS: R22.2 U5.12
DD-!CS: DD:U1.4 RN6.11
DD-A-H: DD:U1.13 RN6.9
DD-A-L: DD:U1.14 RN8.16
DD-B-H: DD:U1.15 RN8.15
DD-B-L: DD:U1.16 RN8.14
DD-C-H: DD:U1.17 RN8.13
DD-C-L: DD:U1.18 RN8.12
DD-H1: DD:J1.3 RN8.11
DD-H2: DD:J1.2 RN8.10
DD-H3: DD:J1.1 RN8.9
DD:!FAULT: DD:U1.2
DD:!OCTW: DD:U1.1
DD:AVDD: DD:C2.1 DD:U1.23
DD:BST-A: DD:C6.1 DD:U1.44
DD:BST-B: DD:C7.1 DD:U1.39
DD:BST-C: DD:C8.1 DD:U1.34
DD:CP1: DD:C3.1 DD:U1.10
DD:CP2: DD:C3.2 DD:U1.11
DD:EN-GATE: DD:R1.2 DD:U1.12
DD:GH-A: DD:Q1.4 DD:U1.43
DD:GH-B: DD:Q3.4 DD:U1.38
DD:GH-C: DD:Q5.4 DD:U1.33
DD:GL-A: DD:Q2.4 DD:U1.41
DD:GL-B: DD:Q4.4 DD:U1.36
DD:GL-C: DD:Q6.4 DD:U1.31
DD:GVDD: DD:C9.1 DD:U1.9
DD:PHASE-A: DD:C6.2 DD:J1.8 DD:Q1.1 DD:Q1.2 DD:Q1.3 DD:Q2.5678 DD:U1.42
DD:PHASE-B: DD:C7.2 DD:J1.7 DD:Q3.1 DD:Q3.2 DD:Q3.3 DD:Q4.5678 DD:U1.37
DD:PHASE-C: DD:C8.2 DD:J1.6 DD:Q5.1 DD:Q5.2 DD:Q5.3 DD:Q6.5678 DD:U1.32
DIP-1: IC1.22 S2.1
DIP-2: IC1.23 S2.2
DIP-3: IC1.24 S2.3
DOT-CLK-1: LED1.5 R15.2 U2.4
DOT-CLK-1-2: LED1.2 LED2.5
DOT-CLK-2-3: LED2.2 LED3.5
DOT-MOSI-1-2: LED1.3 LED2.4
DOT-MOSI-2-3: LED2.3 LED3.4
EN: C26.1 R18.2 U3.17
EN1: R21.2 U4.17
EN-PWR: R18.1 R21.1 S3.2 U5.9 U5.16
EN-PWR-PRE: R16.1 R17.2 S3.1
FB: R25.1 R26.2 U3.1
FB1: R27.1 R28.2 U4.1
FPGA-CLK: U1.50 X1.3
FPGA-DONE: KIT1.P$15 R10.1 U1.72
FPGA-INIT: KIT1.P$14 R11.2 U1.40
FPGA-PROG: KIT1.P$13 R9.1 U1.1
GND: C1.2 C2.2 C3.2 C4.2 C5.2 C6.2 C7.2 C8.2 C9.2 C10.2 C11.2 C12.2 C13.2 C14.2 C15.2 C16.2 C17.2 C18.2 C19.2 C20.2 C21.2 C22.2 C23.2 C24.2 C25.2 C26.2 C27.2 C28.2 C29.2 C30.2 D2.C D3.C D4.C DD:C1.2 DD:C2.2 DD:C4.2 DD:C9.2 DD:C10.2 DD:J1.4 DD:Q2.1 DD:Q2.2 DD:Q2.3 DD:Q4.1 DD:Q4.2 DD:Q4.3 DD:Q6.1 DD:Q6.2 DD:Q6.3 DD:U1.3 DD:U1.8 DD:U1.20 DD:U1.24 DD:U1.30 DD:U1.35 DD:U1.40 DD:U1.46 DD:U1.47 DD:U1.48 DD:U1.PAD IC1.10 IC1.16 IC1.17 J1.7 J2.2 J3.6 J4.6 J5.1 J6.2 KIT1.GND KIT2.5 LED1.6 LED2.6 LED3.6 M1:C1.2 M1:C2.2 M1:C9.2 M1:C10.2 M1:C12.2 M1:C13.2 M1:J1.2 M1:J2.3 M1:Q2.1 M1:Q2.2 M1:Q2.3 M1:Q4.1 M1:Q4.2 M1:Q4.3 M1:Q6.1 M1:Q6.2 M1:Q6.3 M1:U1.3 M1:U1.8 M1:U1.24 M1:U1.30 M1:U1.35 M1:U1.40 M1:U1.46 M1:U1.47 M1:U1.48 M1:U1.PAD M2:C1.2 M2:C2.2 M2:C9.2 M2:C10.2 M2:C12.2 M2:C13.2 M2:J1.2 M2:J2.3 M2:Q2.1 M2:Q2.2 M2:Q2.3 M2:Q4.1 M2:Q4.2 M2:Q4.3 M2:Q6.1 M2:Q6.2 M2:Q6.3 M2:U1.3 M2:U1.8 M2:U1.24 M2:U1.30 M2:U1.35 M2:U1.40 M2:U1.46 M2:U1.47 M2:U1.48 M2:U1.PAD M3:C1.2 M3:C2.2 M3:C9.2 M3:C10.2 M3:C12.2 M3:C13.2 M3:J1.2 M3:J2.3 M3:Q2.1 M3:Q2.2 M3:Q2.3 M3:Q4.1 M3:Q4.2 M3:Q4.3 M3:Q6.1 M3:Q6.2 M3:Q6.3 M3:U1.3 M3:U1.8 M3:U1.24 M3:U1.30 M3:U1.35 M3:U1.40 M3:U1.46 M3:U1.47 M3:U1.48 M3:U1.PAD M4:C1.2 M4:C2.2 M4:C9.2 M4:C10.2 M4:C12.2 M4:C13.2 M4:J1.2 M4:J2.3 M4:Q2.1 M4:Q2.2 M4:Q2.3 M4:Q4.1 M4:Q4.2 M4:Q4.3 M4:Q6.1 M4:Q6.2 M4:Q6.3 M4:U1.3 M4:U1.8 M4:U1.24 M4:U1.30 M4:U1.35 M4:U1.40 M4:U1.46 M4:U1.47 M4:U1.48 M4:U1.PAD Q1.2 Q2.2 R2.2 R4.2 R8.2 R13.1 R15.1 R17.1 R19.1 R20.1 R22.1 R23.1 R24.1 R26.1 R28.1 S1.C1 S1.C2 S2.4 S2.5 S2.6 S3.3 S3.LEG1 S3.LEG3 U1.11 U1.19 U1.27 U1.37 U1.46 U1.55 U1.61 U1.73 U1.90 U1.99 U1.118 U1.127 U1.133 U2.3 U3.3 U3.12 U3.13 U3.14 U4.3 U4.12 U4.13 U4.14 U5.13 U6.2 U7.2 X1.2
GPB0: IC1.1 RN9.8
GPB1: IC1.2 RN9.7
GPB2: IC1.3 RN9.6
GPB3: IC1.4 RN9.5
GPB4: IC1.5 RN9.4
GPB5: IC1.6 RN9.3
GPB6: IC1.7 RN9.2
GPB7: IC1.8 RN9.1
HEX-0: IC1.28 S1.1
HEX-1: IC1.25 S1.2
HEX-2: IC1.27 S1.4
HEX-3: IC1.26 S1.8
INT-I2C: J3.3 KIT1.P$3
INT-ICM: KIT1.P$16 KIT2.6
INT-IO: IC1.20 KIT1.P$20
INT-RAD0: J2.4 KIT1.P$30
LED-DD: D8.C RN9.16
LED-KICK: D1.C RN9.9
LED-M1: D7.C RN9.15
LED-M2: D6.C RN9.14
LED-M3: D10.C RN9.13
LED-M4: D9.C RN9.12
M1-!CS: M1:U1.4 RN5.13
M1-A-H: M1:U1.15 RN5.9
M1-A-L: M1:U1.16 RN6.16
M1-B-H: M1:U1.13 RN5.11
M1-B-L: M1:U1.14 RN5.10
M1-C-H: M1:U1.17 RN6.14
M1-C-L: M1:U1.18 RN6.13
M1-ENC-A: M1:J2.2 RN5.14
M1-ENC-B: M1:J2.1 RN5.12
M1-H1: M1:J1.1 RN6.10
M1-H2: M1:J1.3 RN6.12
M1-H3: M1:J1.5 RN6.15
M1:!FAULT: M1:U1.2
M1:!OCTW: M1:U1.1
M1:+3.3V: M1:C1.1 M1:C10.1 M1:R1.1 M1:U1.19 M1:U1.20 M1:U1.45
M1:AVDD: M1:C2.1 M1:U1.23
M1:BST-A: M1:C6.1 M1:U1.44
M1:BST-B: M1:C7.1 M1:U1.39
M1:BST-C: M1:C8.1 M1:U1.34
M1:CP1: M1:C3.1 M1:U1.10
M1:CP2: M1:C3.2 M1:U1.11
M1:EN-GATE: M1:R1.2 M1:U1.12
M1:GH-A: M1:Q1.4 M1:U1.43
M1:GH-B: M1:Q3.4 M1:U1.38
M1:GH-C: M1:Q5.4 M1:U1.33
M1:GL-A: M1:Q2.4 M1:U1.41
M1:GL-B: M1:Q4.4 M1:U1.36
M1:GL-C: M1:Q6.4 M1:U1.31
M1:GVDD: M1:C9.1 M1:U1.9
M1:PHASE-A: M1:C7.2 M1:J1.7 M1:Q3.1 M1:Q3.2 M1:Q3.3 M1:Q4.5678 M1:U1.37
M1:PHASE-B: M1:C6.2 M1:J1.8 M1:Q1.1 M1:Q1.2 M1:Q1.3 M1:Q2.5678 M1:U1.42
M1:PHASE-C: M1:C8.2 M1:J1.6 M1:Q5.1 M1:Q5.2 M1:Q5.3 M1:Q6.5678 M1:U1.32
M1:SO1: M1:U1.21
M1:SO2: M1:U1.22
M2-!CS: M2:U1.4 RN3.16
M2-A-H: M2:U1.15 RN3.13
M2-A-L: M2:U1.16 RN3.12
M2-B-H: M2:U1.13 RN3.15
M2-B-L: M2:U1.14 RN3.14
M2-C-H: M2:U1.17 RN3.11
M2-C-L: M2:U1.18 RN3.10
M2-ENC-A: M2:J2.2 RN1.10
M2-ENC-B: M2:J2.1 RN1.9
M2-H1: M2:J1.1 RN5.15
M2-H2: M2:J1.3 RN5.16
M2-H3: M2:J1.5 RN3.9
M2:!FAULT: M2:U1.2
M2:!OCTW: M2:U1.1
M2:+3.3V: M2:C1.1 M2:C10.1 M2:R1.1 M2:U1.19 M2:U1.20 M2:U1.45
M2:AVDD: M2:C2.1 M2:U1.23
M2:BST-A: M2:C6.1 M2:U1.44
M2:BST-B: M2:C7.1 M2:U1.39
M2:BST-C: M2:C8.1 M2:U1.34
M2:CP1: M2:C3.1 M2:U1.10
M2:CP2: M2:C3.2 M2:U1.11
M2:EN-GATE: M2:R1.2 M2:U1.12
M2:GH-A: M2:Q1.4 M2:U1.43
M2:GH-B: M2:Q3.4 M2:U1.38
M2:GH-C: M2:Q5.4 M2:U1.33
M2:GL-A: M2:Q2.4 M2:U1.41
M2:GL-B: M2:Q4.4 M2:U1.36
M2:GL-C: M2:Q6.4 M2:U1.31
M2:GVDD: M2:C9.1 M2:U1.9
M2:PHASE-A: M2:C7.2 M2:J1.7 M2:Q3.1 M2:Q3.2 M2:Q3.3 M2:Q4.5678 M2:U1.37
M2:PHASE-B: M2:C6.2 M2:J1.8 M2:Q1.1 M2:Q1.2 M2:Q1.3 M2:Q2.5678 M2:U1.42
M2:PHASE-C: M2:C8.2 M2:J1.6 M2:Q5.1 M2:Q5.2 M2:Q5.3 M2:Q6.5678 M2:U1.32
M2:SO1: M2:U1.21
M2:SO2: M2:U1.22
M3-!CS: M3:U1.4 RN4.12
M3-A-H: M3:U1.15 RN4.9
M3-A-L: M3:U1.16 RN2.16
M3-B-H: M3:U1.13 RN4.11
M3-B-L: M3:U1.14 RN4.10
M3-C-H: M3:U1.17 RN2.15
M3-C-L: M3:U1.18 RN2.14
M3-ENC-A: M3:J2.2 RN2.10
M3-ENC-B: M3:J2.1 RN2.9
M3-H1: M3:J1.1 RN2.11
M3-H2: M3:J1.3 RN2.12
M3-H3: M3:J1.5 RN2.13
M3:!FAULT: M3:U1.2
M3:!OCTW: M3:U1.1
M3:+3.3V: M3:C1.1 M3:C10.1 M3:R1.1 M3:U1.19 M3:U1.20 M3:U1.45
M3:AVDD: M3:C2.1 M3:U1.23
M3:BST-A: M3:C6.1 M3:U1.44
M3:BST-B: M3:C7.1 M3:U1.39
M3:BST-C: M3:C8.1 M3:U1.34
M3:CP1: M3:C3.1 M3:U1.10
M3:CP2: M3:C3.2 M3:U1.11
M3:EN-GATE: M3:R1.2 M3:U1.12
M3:GH-A: M3:Q1.4 M3:U1.43
M3:GH-B: M3:Q3.4 M3:U1.38
M3:GH-C: M3:Q5.4 M3:U1.33
M3:GL-A: M3:Q2.4 M3:U1.41
M3:GL-B: M3:Q4.4 M3:U1.36
M3:GL-C: M3:Q6.4 M3:U1.31
M3:GVDD: M3:C9.1 M3:U1.9
M3:PHASE-A: M3:C7.2 M3:J1.7 M3:Q3.1 M3:Q3.2 M3:Q3.3 M3:Q4.5678 M3:U1.37
M3:PHASE-B: M3:C6.2 M3:J1.8 M3:Q1.1 M3:Q1.2 M3:Q1.3 M3:Q2.5678 M3:U1.42
M3:PHASE-C: M3:C8.2 M3:J1.6 M3:Q5.1 M3:Q5.2 M3:Q5.3 M3:Q6.5678 M3:U1.32
M3:SO1: M3:U1.21
M3:SO2: M3:U1.22
M4-!CS: M4:U1.4 RN7.16
M4-A-H: M4:U1.15 RN7.15
M4-A-L: M4:U1.16 RN7.14
M4-B-H: M4:U1.13 RN4.16
M4-B-L: M4:U1.14 RN4.15
M4-C-H: M4:U1.17 RN7.13
M4-C-L: M4:U1.18 RN7.12
M4-ENC-A: M4:J2.2 RN4.14
M4-ENC-B: M4:J2.1 RN4.13
M4-H1: M4:J1.1 RN7.9
M4-H2: M4:J1.3 RN7.10
M4-H3: M4:J1.5 RN7.11
M4:!FAULT: M4:U1.2
M4:!OCTW: M4:U1.1
M4:+3.3V: M4:C1.1 M4:C10.1 M4:R1.1 M4:U1.19 M4:U1.20 M4:U1.45
M4:AVDD: M4:C2.1 M4:U1.23
M4:BST-A: M4:C6.1 M4:U1.44
M4:BST-B: M4:C7.1 M4:U1.39
M4:BST-C: M4:C8.1 M4:U1.34
M4:CP1: M4:C3.1 M4:U1.10
M4:CP2: M4:C3.2 M4:U1.11
M4:EN-GATE: M4:R1.2 M4:U1.12
M4:GH-A: M4:Q1.4 M4:U1.43
M4:GH-B: M4:Q3.4 M4:U1.38
M4:GH-C: M4:Q5.4 M4:U1.33
M4:GL-A: M4:Q2.4 M4:U1.41
M4:GL-B: M4:Q4.4 M4:U1.36
M4:GL-C: M4:Q6.4 M4:U1.31
M4:GVDD: M4:C9.1 M4:U1.9
M4:PHASE-A: M4:C7.2 M4:J1.7 M4:Q3.1 M4:Q3.2 M4:Q3.3 M4:Q4.5678 M4:U1.37
M4:PHASE-B: M4:C6.2 M4:J1.8 M4:Q1.1 M4:Q1.2 M4:Q1.3 M4:Q2.5678 M4:U1.42
M4:PHASE-C: M4:C8.2 M4:J1.6 M4:Q5.1 M4:Q5.2 M4:Q5.3 M4:Q6.5678 M4:U1.32
M4:SO1: M4:U1.21
M4:SO2: M4:U1.22
MISO: J1.1 J4.1 KIT1.P$5 KIT2.2
MISO-AUX: DD:U1.6 M1:U1.6 M2:U1.6 M3:U1.6 M4:U1.6 RN1.12
MISO-FPGA: KIT1.P$35 U1.44
MISO-RADIO: J2.3 KIT1.P$28
MOSI: J1.2 J4.2 KIT1.P$4 KIT2.1 LED1.4
MOSI-AUX: DD:U1.5 M1:U1.5 M2:U1.5 M3:U1.5 M4:U1.5 RN1.11
MOSI-FPGA: KIT1.P$36 U1.63
MOSI-RADIO: J2.7 KIT1.P$27
N$1: F2.2 R30.1
N$2: F1.2 R29.1
PWR-ERR: D5.C U6.4 U7.4
R-P1: RN8.1 U1.82
R-P2: RN8.2 U1.81
R-P3: RN8.3 U1.77
R-P4: RN8.4 U1.76
R-P5: RN8.5 U1.75
R-P6: RN8.6 U1.74
R-P7: RN8.7 U1.70
R-P8: RN8.8 U1.68
R-P9: RN6.1 U1.91
R-P10: RN6.2 U1.89
R-P11: RN6.3 U1.88
R-P12: RN6.4 U1.87
R-P13: RN6.5 U1.86
R-P14: RN6.6 U1.85
R-P15: RN6.7 U1.84
R-P16: RN6.8 U1.83
R-P17: RN5.1 U1.101
R-P18: RN5.2 U1.98
R-P19: RN5.3 U1.97
R-P20: RN5.4 U1.96
R-P21: RN5.5 U1.95
R-P22: RN5.6 U1.94
R-P23: RN5.7 U1.93
R-P24: RN5.8 U1.92
R-P25: RN3.1 U1.117
R-P26: RN3.2 U1.116
R-P27: RN3.3 U1.113
R-P28: RN3.4 U1.112
R-P29: RN3.5 U1.106
R-P30: RN3.6 U1.105
R-P31: RN3.7 U1.104
R-P32: RN3.8 U1.103
R-P36: RN1.4 U1.125
R-P37: RN1.5 U1.124
R-P38: RN1.6 U1.123
R-P39: RN1.7 U1.122
R-P40: RN1.8 U1.119
R-P41: RN2.1 U1.5
R-P42: RN2.2 U1.4
R-P43: RN2.3 U1.3
R-P44: RN2.4 U1.2
R-P45: RN2.5 U1.142
R-P46: RN2.6 U1.141
R-P47: RN2.7 U1.140
R-P48: RN2.8 U1.139
R-P49: RN4.1 U1.21
R-P50: RN4.2 U1.20
R-P51: RN4.3 U1.17
R-P52: RN4.4 U1.16
R-P53: RN4.5 U1.15
R-P54: RN4.6 U1.14
R-P55: RN4.7 U1.8
R-P56: RN4.8 U1.7
R-P57: RN7.1 U1.35
R-P58: RN7.2 U1.34
R-P59: RN7.3 U1.32
R-P60: RN7.4 U1.31
R-P61: RN7.5 U1.26
R-P62: RN7.6 U1.25
R-P63: RN7.7 U1.24
R-P64: RN7.8 U1.23
SCK: J1.3 J4.3 KIT1.P$6 KIT2.3 U2.2
SCK-AUX: DD:U1.7 M1:U1.7 M2:U1.7 M3:U1.7 M4:U1.7 RN1.13
SCK-FPGA: KIT1.P$34 U1.71
SCK-RADIO: J2.8 KIT1.P$29
SCL: IC1.12 J3.5 KIT1.P$25 R6.1
SDA: IC1.13 J3.4 KIT1.P$26 R5.1
SENSE-BATT: C1.1 KIT1.P$33 R1.2 R2.1
SENSE-VIN: C2.1 KIT1.P$32 R3.2 R4.1
SW: U3.456
SW1: U4.456
V_MTRAIN: KIT1.VDD R14.2
VBATT: J5.2 U5.1 U5.2 U5.3 U5.4 U5.5 U5.6 U5.7 U5.8 XF1.1 XF1.2
VBUS: KIT1.VBUS
VIN: J6.1 R16.2 U5.17

## Tracks (layer width: path | path; a pad name or v marks a point on that pad's centre or on a via)
5V-LED  (via drill 0.35)
  Top 0.3: D3.A v63,6.25
  Bottom 0.3: v63,6.25 63,5.35 R32.2
5V-LED1  (via drill 0.35)
  Top 0.3: D4.A v63,8.88
  Bottom 0.3: v63,8.88 63.1,8.77 R33.2
18.5V-LED  (via drill 0.35)
  Top 0.3: D2.A v63,4
  Bottom 0.3: v63,4 63,3.1 R31.1
!CS!-DOT
  Top 0.2: 89.82,108.93 91.25,107.5 92.75,107.5 93.38,108.12 93.38,109.62 91.88,111.12 81.42,111.12 81.36,111.06 72.1,111.06 71.91,111.25 57,111.25 45.75,100 41.64,100 40.25,101.39 38.14,101.39 36.92,102.6
  Top 0.3: 89.82,108.93 KIT1.P$11 | 36.92,102.6 U2.1
!CS!-FPGA  (via drill 0.35)
  Top 0.3: U1.69 61,72.6 61.6,72 v62,72
  Bottom 0.3: v62,72 62,76.11 62.89,77 64.75,77 65.75,78 65.75,81.5 68.75,84.5 90.45,84.5 KIT1.P$31
!CS!-ICM  (via drill 0.35)
  Top 0.3: v70.5,105 70.39,104.89 70.39,95.04 KIT2.4
  Bottom 0.3: KIT1.P$18 71.7,106.2 v70.5,105
!CS!-IR  (via drill 0.35)
  Top 0.2: v65.25,107 74.25,107 75.62,108.38 75.62,109.88 76.25,110.5 90.25,110.5 91.82,108.93
  Top 0.3: 91.82,108.93 KIT1.P$10
  Bottom 0.2: v65.25,107 61.79,107 57.75,102.96 J1.4
!CS!-KICK  (via drill 0.35)
  Top 0.2: v109.25,88.5 v117.75,88.5
  Bottom 0.2: KIT1.P$8 98.25,107.78 98.25,99.5 98.75,99 v109.25,88.5 | v117.75,88.5 118.25,88 J4.4
  Bottom 0.3: 98.75,99
!CS!-RAD0  (via drill 0.35)
  Top 0.3: J2.5 55.75,99.6 62.35,106.2 74,106.2 v74.25,106.45
  Bottom 0.3: v74.25,106.45 v74.24,106.46 KIT1.P$17
!RST!-I2C  (via drill 0.35)
  5v 0.3: v43.95,105.5 41.55,103.1 J3.2
  Bottom 0.3: RN9.11 44,90.75 44.45,91.2 44.45,105 v43.95,105.5
!RST!-IR
  Bottom 0.3: KIT1.P$9 92.87,110.62 71,110.62 70.38,110 70.38,108.38 68,106 62.15,106 58.75,102.6 J1.5
!RST!-KICK
  Bottom 0.3: KIT1.P$7 98.75,108.04 98.75,100 111.25,87.5 116.25,87.5 116.75,87 J4.5
!RST!-NETWORK
  Top 0.3: KIT1.!RST 107.26,89.89 107.25,89.88 Q2.3
!RST!-RADIO
  Top 0.2: J2.6 54.75,101.1 61.27,107.62 67.88,107.62 69.16,108.91 KIT1.P$19
!RST!_CTRL
  Top 0.3: R14.1 113.15,94.75 108.25,94.75 | Q1.3 107.25,95 107.5,94.75 108.25,94.75 | Q2.1 108.2,94.7 108.25,94.75
+1.2V  (via drill 0.35, 0.75)
  Top 0.3: U1.80 58.52,68.25 59.02,67.75 v60.75,67.75 | U1.45 73,72.73 73.25,72.48 v73.25,72 | v63.75,54 62.75,54 62.5,53.75 U1.115 | v77.25,58.5 77.5,58.25 U1.9
  3v3 0.3: v75.62,28.62 75.62,27.88 72.75,25 72.75,22 62.25,11.5 60.75,11.5 v59.25,10
  5v 0.3: v64.25,60 64.25,54.5 v63.75,54 63.75,52.5 65.25,51 74.75,51 77.25,48.5 77.25,46 v79.25,44
  Bottom 0.3: v73.25,72 73.25,71.6 C19.1 71.25,69.6 71.25,66.5 70.75,66 64.25,66 | C6.1 64,54.25 v63.75,54 | 64.25,66 v64.25,60 74.6,60 C10.1 77,58.75 v77.25,58.5 | v60.75,67.75 61.4,67.75 C14.1 63.15,66 64.25,66 | v79.25,44 79.25,37.65 R34.2 75.6,28.65 v75.62,28.62
+1.2V-PRE
  Bottom 0.3: U6.5 73.9,32.86 R34.1 73.9,36.3 C29.1
+2.5V  (via drill 0.35, 0.75)
  Top 0.3: U1.30 77.98,68.75 77.73,69 v77.25,69 | U1.65 63,72.25 v62.75,72 | U1.102 58.52,57.25 58.77,57 v60.75,57 | U1.137 73.5,53.4 72.9,54 v72.75,54
  3v3 0.3: v76,26 76,13.75 72.25,10 61.25,10 60.25,9 57.75,9 v56.75,10
  5v 0.3: v62.75,72 62.75,71 61.75,70 | 61.75,56 61.75,53.5 64.75,50.5 73.75,50.5 76.25,48 v76.25,45.5 | 61.75,56 61.75,62 | 61.75,62 61.75,70 | 61.75,56 v60.75,57 | 61.75,70 v60.75,70 | 61.75,62 71.75,62 | 71.75,62 75.25,62 | 75.25,62 78.25,62 81.25,59 v81.25,57 | 71.75,62 71.75,55 v72.75,54 | 75.25,62 75.25,67 v77.25,69
  Bottom 0.3: R10.2 59.15,70 v60.75,70 | C15.1 76.85,69 v77.25,69 | C20.1 62.85,72 v62.75,72 | C9.1 61.6,57 v60.75,57 | C4.1 72.75,54.65 v72.75,54 | v81.25,57 79,57 R9.2 | v76,26 76,26.25 80.75,31 80.75,44 79.25,45.5 v76.25,45.5 75,45.5 67.9,38.25 67.9,35.15 R35.2
+2.5V-PRE
  Bottom 0.3: U7.5 70.7,33.9 R35.1 C30.1
+3.3V  (via drill 0.35, 0.75)
  Top 0.3: U1.100 59.5,58.25 v59.75,58 | D7.A 14,34.25 v14,33.5 | v126.25,39 125.75,39 D9.A | D6.A 31.25,10.19 v31.25,9.5 | v63.75,11 63.75,11.25 D5.A 63,11 v59.75,7.75 | U1.79 59.5,68.75 v59.75,69 | v77.15,67.75 U1.28 | v70.75,72 71,72.25 U1.49 | U1.42 74.5,72.25 v74.25,72 | 65.25,72 66.75,72 67,72.25 U1.57 | 65.25,72 v63.75,72 | U1.64 63.5,72.25 v63.75,72 | U1.62 64.5,72.23 64.27,72 v63.75,72 | v66.25,54 65.75,54 65.5,53.75 U1.121 | U1.138 74,53.4 74.25,53.65 v74.25,54 | U1.143 76.5,53.27 76.25,53.52 v76.25,54 | R6.2 79,90.85 | 79,90.85 R5.2 | v121.75,35.5 121.54,35.29 D10.A | U1.13 77.5,60.25 v77.25,60.5 | 79,90.85 79,91.25 v79.25,91.5 | 65.25,72 65.5,72.25 U1.60 | DD:U1.19 40.4,83 DD:C10.1 40.9,84 v39.75,84 | v29.75,74 29.75,75.1 30.15,75.5 DD:U1.45 | v13.25,72 D8.A | U2.5 35.8,105.55 v35.75,105.6 | R12.2 v111.75,93.12 | D1.A v122.5,86.12
  Bottom 0.3: C16.1 61.75,69 v59.75,69 | v77.15,67.75 77.07,67.75 76.25,66.93 76.25,66.15 C13.1 76.25,65.85 v76.25,64.5 76.25,62.5 75.85,62.1 C12.1 76.75,61 v77.25,60.5 | C17.1 70.25,71.5 v70.75,72 | C21.1 74.25,70.65 v74.25,72 74.25,73.6 R11.1 | v63.75,72 64.75,72 65.9,70.85 C18.1 | C11.1 60.65,58 v59.75,58 | C7.1 v66.25,54 | C5.1 74.25,54.9 v74.25,54 | C8.1 76.75,54.5 v76.25,54 | X1.4 68.23,77.02 | 68.23,77.02 71.15,79.94 C22.1 | v67.75,82.5 67.96,82.29 X1.1 67.96,77.29 68.23,77.02 | U6.1 74.45,30.3 73.75,31 73.36,31 72.55,30.19 U6.3 71.86,29 71.39,29 U7.1 70.7,30.57 70.52,30.75 69,30.75 68.8,30.55 U7.3 68.25,29.14 v68.25,26.75 | DD:C1.1 29.65,73.9 v29.75,74 | DD:R1.1 39.75,82.6 v39.75,84 | IC1.9 33.48,96.17 32.3,95 | IC1.18 27.62,95 32.3,95 | 32.3,95 30.27,92.97 | 30.27,92.97 30.23,92.92 IC1.15 | 30.27,92.97 30.27,91.05 30.95,90.38 C23.1 32.12,89.38 v32.15,89.4 | J4.7 v127.25,85 | R33.1 v59.75,7.75
  Bottom 0.4: J1.6 59.75,94.9 v59.25,94.4
  other vias: 51.25,24 51.75,23.5 52.25,23 50.75,23.5 50.25,23
  pour 3v3 (isolate 0.4, rank 2, no thermals): 0.25,92 0.25,34 33.88,0.38 104,0.38 136.25,32.62 136.25,92 113,115.25 24.27,115.25
  pour Bottom (no thermals): 51.38,21.38 49.75,23 51.25,24.5 52.88,22.88
+3.3V-FUSE
  Bottom 0.3: R27.2 43,6.9 43,10.38 43.62,11 U4.789
  pour Bottom (no thermals): 44,10.75 46,10.75 46,12.62 46,12.75 46.5,13.25 46.5,16.12 47.38,17 46.25,18.12 44,15.88
+5V  (via drill 0.35, 0.75)
  Top 0.3: v90.25,90 89.5,90.75 R3.1
  Top 0.4: LED2.1 v45.75,113 | LED1.1 v39.75,113 | LED3.1 50.7,112.05 v51.75,111 | J2.1 59.84,95.76 59.84,94.71 v60.24,94.31
  Bottom 0.3: v59.75,5.5 61.15,5.5 R32.1
  Bottom 0.7: R29.2 59.4,35.35 v59.38,35.38
  pour 5v (no thermals): 24.12,115 0.25,91.75 0.25,33.88 33.75,0.25 102.5,0.25 136.12,32.5 136.25,92 112.5,115
+5V-FUSE
  pour Bottom (no thermals): 59.75,23 59.75,20.75 62,20.75 62,23 61.75,23.5 61.75,28 60.25,28 60.25,23.5
  pour Bottom (no thermals): 61.75,28 61.75,26 59.75,26 59.75,30.5 61.75,30.5
+18.5V  (via drill 0.35, 0.75)
  Top 0.3: R7.1 73.85,41.9 84.38,31.38 v84.38,15.88 | R1.1 98.5,88.25 v98.25,88 | DD:U1.25 v30.25,86.25 | M1:U1.25 v28.25,61.75 | M2:U1.25 35.59,34.66 v35.25,35 | v95.12,28.25 95.12,28.25 M3:U1.25 | M4:U1.25 v109.35,58.5
  3v3 0.3: v98.25,88 98.25,84 103.75,78.5 M3:C13.1
  Bottom 0.3: R31.2 v59.75,3 59.25,3 58,4.25 58,20.25 M3:C12.1 | v30.25,86.25 28,88.5 23.75,88.5 22.25,87 DD:Q5.5678 | v28.25,61.75 26.5,63.5 21.75,63.5 20.5,62.25 M1:Q5.5678 | v35.25,35 32.75,35 30.25,32.5 30.25,31.12 M2:Q5.5678 | v95.12,28.25 95.12,26.12 97.41,23.84 M3:Q5.5678 | v109.35,58.5 113.75,58.5 116.5,61.25 M4:Q3.5678 | U4.16 50.35,9.75 C25.1
  other vias: 115.25,74.5 116.25,74.5 117.25,74.5 118.25,74.5 118.25,73.5 117.25,73.5 116.25,73.5 115.25,73.5 115.25,72.5 116.25,72.5 117.25,72.5 118.25,72.5 25.75,32.5 26.75,31.5 26.75,32.5 26.75,33.5 27.75,32.5 27.75,33.5 28.75,33.5 27.75,34.5 28.75,34.5 29.75,34.5 28.75,35.5 17.75,69.5 18.75,69.5 19.75,69.5 20.75,69.5 17.75,68.5 18.75,68.5 19.75,68.5 20.75,68.5 17.75,67.5 18.75,67.5 19.75,67.5 20.75,67.5 73.75,16 74.75,16 73.75,15 74.75,15 73.75,14 109.75,36.5 110.5,37.12 111.25,37.88 112.12,37.12 111.38,36.5 110.62,35.75 111.62,35 112.25,35.62 113,36.25 112.5,34.12 113.12,34.75 113.88,35.5 72.75,16 72.75,15 72.75,14 74.75,14 52.25,10 52.25,11.5 52.25,10.75
  pour Bottom (no thermals): 64,20.4 67.75,20.4 67.75,21 69.25,21 69.25,20.1 64,20.1
  pour Bottom (no thermals): 40.75,17 31.25,33 32.25,32
  pour Bottom (no thermals): 114.25,75 114.25,52.5 119.25,52.5 119.25,75
  pour Bottom (no thermals): 28.75,36 25.75,33 25.25,32.5 40.75,17 44.25,20.5
  pour Bottom (no thermals): 17.25,70 17.25,47 22.25,47 22.25,69.5 24.25,71.5 24.25,72 24.25,89 19.25,89 19.25,72
  pour Vbatt (no thermals): 2.25,94 14.75,94 15.25,94.5 26.25,94.5 32.25,88.5 32.25,72 33.75,70.5 45.25,70.5 46.25,69.5 46.25,64 45.25,63 35.25,63 29.75,57.5 29.75,47.5 30.25,47 32.25,47 52.75,26.5 76.25,26.5 86.25,16.5 95.75,16.5 100.75,21.5 100.75,22 93.5,29.25 102.75,38.5 102.75,43 94.75,51 94.75,55.5 103.25,64 103.25,82 136.25,82 136.25,32.62 104,0.38 34.88,0.38 0.25,35 0.25,92
  pour Bottom (no thermals): 67.75,22.5 67.75,20 68.75,20 69.9,18.5 69.9,15.5 72.13,13.5 76.25,13.5 76.25,17 72.25,17 71.75,17.5 71.75,21.5 70.75,22.5
  pour Bottom (no thermals): 96.25,24 99.75,20.5 114.75,35.5 111.25,39
  pour Bottom (no thermals): 50.25,10.75 51.75,10.75 51.75,11.88 52.75,11.88 52.75,9.62 50.25,9.62
AAM
  Bottom 0.2: R19.2 64.55,17.04 64.55,19.1 U3.18
AAM1
  Bottom 0.3: U4.18 50.85,8.75 R20.2
BATT-FPGA
  Top 0.3: U1.136 73,50.25 77,46.25 77,45.1 C3.1 | C3.1 R8.1 | C3.1 R7.2
BATT_PWR_AVAIL
  Top 0.3: R12.1 R13.2 108.15,95.6 107.8,95.95 Q1.1
BOLT1  (via drill 3.8 pad 7.2)
  other vias: 11.25,96.94
BOLT2  (via drill 3.8 pad 7.2)
  other vias: 125.25,96.94
BOLT3  (via drill 3.8 pad 7.2)
  other vias: 116.75,40.94
BOLT4  (via drill 3.8 pad 7.2)
  other vias: 19.75,40.94
CS1
  Top 0.3: U5.10 66,27.25 65.25,26.5 R23.2
CS2
  Top 0.3: R24.2 72.85,26 71.25,26 70,27.25 U5.15
CS-DIS
  Top 0.3: R22.2 67.6,26 U5.12
DD-!CS
  Top 0.3: RN6.11 51.9,67.5 47.38,67.5 39.38,75.5 DD:U1.4
DD-A-H
  Top 0.3: RN6.9 43.75,77.25 43.75,79 42.75,80 DD:U1.13
DD-A-L
  Top 0.3: RN8.16 51.63,70.45 44.7,77.38 44.7,79.19 43.39,80.5 DD:U1.14
DD-B-H
  Top 0.3: RN8.15 51.63,71.25 45.65,77.23 45.65,79.37 44.02,81 DD:U1.15
DD-B-L
  Top 0.3: RN8.14 51.63,72.05 46.25,77.43 46.25,80 44.75,81.5 DD:U1.16
DD-C-H
  Top 0.3: RN8.13 51.63,72.85 47.2,77.28 47.2,80.19 45.39,82 DD:U1.17
DD-C-L
  Top 0.3: RN8.12 51.63,73.65 48.15,77.13 48.15,80.37 46.02,82.5 DD:U1.18
DD-H1
  Top 0.3: RN8.11 51.63,74.45 48.75,77.33 48.75,82.5 43.75,87.5 29.25,87.5 26.25,90.5 14.6,90.5 10.1,86 DD:J1.3
DD-H2
  Top 0.3: RN8.10 51.63,75.25 49.75,77.13 49.75,82.5 44.27,87.98 29.77,87.98 26.75,91 14.23,90.98 11.25,88 DD:J1.2
DD-H3
  Top 0.3: RN8.9 50.75,77.25 50.75,82.5 44.82,88.43 30.32,88.43 27.25,91.5 14.04,91.43 12.61,90 DD:J1.1
DD:AVDD
  Top 0.3: DD:C2.1 40.15,85 DD:U1.23
DD:BST-A
  Top 0.3: DD:C6.1 26.25,70.5 28.75,73 28.75,75 29.75,76 DD:U1.44
DD:BST-B
  Top 0.3: DD:C7.1 26,77.25 27.25,78.5 DD:U1.39
DD:BST-C
  Top 0.3: DD:U1.34 28.89,81 27.03,82.85 25.9,82.85 25,83.75 DD:C8.1
DD:CP1
  Top 0.3: DD:C3.1 40.4,78.5 DD:U1.10
DD:CP2
  Top 0.3: DD:C3.2 41.4,79 DD:U1.11
DD:EN-GATE  (via drill 0.35)
  Top 0.3: DD:U1.12 v37.25,79.5
  Bottom 0.3: DD:R1.2 37.25,81.1 v37.25,79.5
DD:GH-A  (via drill 0.35)
  Top 0.3: DD:U1.43 29.25,76.5 v27.75,75
  5v 0.3: v27.75,75 26.75,76 17.75,76 v16.75,77
  Bottom 0.3: v16.75,77 17.48,76.27 DD:Q1.4
DD:GH-B  (via drill 0.35)
  Top 0.3: v27.25,79.1 27.25,79 DD:U1.38
  5v 0.3: v27.25,79.1 27.25,81 26.25,82 18.25,82 v16.75,83.5
  Bottom 0.3: v16.75,83.5 16.75,83.13 DD:Q3.4
DD:GH-C  (via drill 0.35)
  Top 0.3: v26.25,83.47 27.25,83.47 29.23,81.5 DD:U1.33
  5v 0.3: v26.25,83.47 23.43,83.47 v17.25,89.66
  Bottom 0.3: v17.25,89.66 17.48,89.42 DD:Q5.4
DD:GL-A
  Top 0.3: DD:U1.41 27.25,77.5 25.66,75.91 DD:Q2.4
DD:GL-B
  Top 0.3: DD:U1.36 29.25,80 26.84,82.41 DD:Q4.4
DD:GL-C
  Top 0.3: DD:U1.31 29.75,82.5 28.35,83.9 28.35,87.4 26.84,88.91 DD:Q6.4
DD:GVDD  (via drill 0.35)
  Top 0.3: DD:U1.9 38.55,77.95 39.4,77.95 39.47,77.88 v39.88,77.88
  Bottom 0.3: v39.88,77.88 38.4,79.35 DD:C9.1
DD:PHASE-A  (via drill 0.35)
  Top 0.3: DD:C6.2 20.75,70.5 20.25,71 20.25,72.93 DD:Q2.5678 19.18,74.07 18.75,74.5 v18.75,77 | DD:U1.42 28.11,77 27.75,76.64 v27.75,76.5
  Top 1.27: DD:J1.8 13.75,76 15.75,74 DD:Q2.5678
  3v3 0.3: v27.75,76.5 27.25,77 v18.75,77
  Bottom 1.27: DD:J1.8 13.25,76 13.75,75.5 13.75,74.5 14.88,73.37 DD:Q1.2
  pour Bottom (no thermals): 16.75,75 18.25,75 18.25,71.75 16.75,71.75
DD:PHASE-B  (via drill 0.35)
  Top 0.3: DD:C7.2 20.5,77.25 20.25,77.5 20.25,79.5 19.25,80.5 DD:Q4.5678 18.75,80.93 v18.75,83.5 | DD:U1.37 28.75,79.5 v28.25,80
  Top 1.27: DD:J1.7 12.75,78 15.25,80.5 DD:Q4.5678
  3v3 0.3: v18.75,83.5 24.75,83.5 v28.25,80
  Bottom 1.27: DD:J1.7 13.75,78 15.75,80 17.34,80 DD:Q3.2
  pour Bottom (no thermals): 16.75,81.5 18.25,81.5 18.25,78.25 16.75,78.25
DD:PHASE-C  (via drill 0.35)
  Top 0.3: DD:U1.32 29.36,82 27.75,83.61 v27.75,84.5 | DD:C8.2 20.5,83.75 20.25,84 20.25,85 20.25,85.5 20.25,85.93 DD:Q6.5678 18.75,87.43 v18.75,89.75
  Top 1.27: DD:J1.6 10.25,80 14.25,84 14.25,86 15.25,87 DD:Q6.5678
  3v3 0.3: v27.75,84.5 26.75,85.5 26.75,88.12 25.12,89.75 v18.75,89.75
  Bottom 1.27: DD:J1.6 12.25,80 13.75,81.5 13.75,85 15.12,86.37 DD:Q5.2
  pour Bottom (no thermals): 18.25,88 18.25,84.75 16.75,84.75 16.75,88
DIP-1  (via drill 0.35)
  Top 0.3: v49.38,100.5 47.52,98.65 38.82,98.65 S2.1
  Bottom 0.3: IC1.22 31.33,97.47 33.35,99.5 33.35,104.85 39.05,110.55 44.7,110.55 47.25,108 47.25,100 47.55,99.7 48.57,99.7 v49.38,100.5
DIP-2  (via drill 0.35)
  Top 0.3: S2.2 37.77,100.19 39.48,100.19 40.58,99.09 46.84,99.09 v48.17,100.42
  Bottom 0.3: IC1.23 30.48,98.12 32.85,100.5 32.85,105.1 38.75,111 45.25,111 47.81,108.44 47.81,100.91 48.17,100.55 v48.17,100.42
DIP-3  (via drill 0.35)
  Top 0.3: S2.3 33.71,99.96 34.62,100.88 39.67,100.88 41,99.55 46.45,99.55 47.93,101.02 48.27,101.02 v48.41,101.16
  Bottom 0.3: IC1.24 30.12,98.78 32.35,101 32.35,105.4 38.45,111.5 45.65,111.5 48.41,108.74 v48.41,101.16
DOT-CLK-1
  Top 0.2: R15.2 41.58,105.33 41.35,105.55 U2.4 36.5,107.88 LED1.5
DOT-CLK-1-2
  Top 0.2: 43,109.75 41.75,111 37.75,111 36.75,112
  Top 0.4: LED1.2 36.75,112.75 36.75,112 | 43,109.75 LED2.5
DOT-CLK-2-3
  Top 0.2: LED2.2 43.25,112.75 43.25,112 43.75,111.5 46.75,111.5 47.88,110.38 48.25,110.38 49,109.62
  Top 0.4: 49,109.62 LED3.5
DOT-MOSI-1-2
  Top 0.2: LED2.4 39.92,110.38 36.38,110.38 34.75,112
  Top 0.4: 34.75,112 34.8,112.05 LED1.3
DOT-MOSI-2-3
  Top 0.2: LED2.3 41.3,112.45 43.25,110.5 46.25,110.5 47.3,109.45
  Top 0.4: 47.3,109.45 LED3.4
EN
  Bottom 0.2: U3.17 65.03,19.75 66.03,18.75 R18.2
  Bottom 0.3: C26.1 R18.2
EN1
  Bottom 0.3: U4.17 52.85,9.25 R21.2
EN-PWR  (via drill 0.35)
  Top 0.3: S3.2 127.75,79.5 132.25,79.5 133.25,78.5 133.25,32 103.25,2 82.89,2 71.32,13.57 71.32,21.57 72.25,22.5 74.25,22.5 76.75,25 76.75,26.5 76.25,27 71.75,27 70.8,27.95 U5.16 70.75,28.55 70.75,29.5 70.25,30 65.83,30 65.2,29.37 U5.9 65.2,28.45 62.25,25.5 62.25,23 67.25,18 v67.25,14
  5v 0.3: v56.75,13.5 v59.25,13.5
  Bottom 0.3: R18.1 69.25,17.75 69.25,15.1 68.25,14 v67.25,14 66.25,13 59.75,13 v59.25,13.5 | R21.1 55.4,13.5 v56.75,13.5
EN-PWR-PRE  (via drill 0.35)
  Top 0.3: S3.1 124.56,80 132.25,80 132.3,79.95 132.44,79.95 133.75,78.64 133.75,31.57 103.68,1.5 82.75,1.5 70.75,13.5 70.75,22 71.75,23 73.75,23 74.75,24 v74.75,25
  Bottom 0.3: R17.2 73.5,26.15 73.5,25.5 | 73.5,25.5 R16.1 | v74.75,25 74.25,25.5 73.5,25.5
FB
  Bottom 0.2: U3.1 63.8,18.2 R26.2
  Bottom 0.3: R26.2 62.1,15.35 61.75,15 59.25,15 58.75,15.5 58.75,24.1 R25.1
FB1
  Bottom 0.3: U4.1 47.8,6.4 R28.2 R27.1
FPGA-CLK  (via drill 0.35)
  Top 0.3: v70.75,76.5 70.5,76.25 U1.50
  Bottom 0.3: X1.3 72.79,76.5 v70.75,76.5
FPGA-DONE  (via drill 0.35)
  Top 0.3: U1.72 59.4,73.5 v58.75,73.5 | KIT1.P$15 79.32,103.43 77.07,101.18 77.07,96.09 75.6,94.62 75.6,90.49 72.93,87.82 71.82,87.82 70.5,86.5 70.5,83.75 68.25,81.5 v63.75,81.5
  Bottom 0.3: R10.1 57.65,73.5 v58.75,73.5 58.75,74.5 63.75,79.5 v63.75,81.5
FPGA-INIT  (via drill 0.35)
  Top 0.3: U1.40 75.5,72.25 v75.75,72 | v77.25,80 74.25,80 73.12,81.12 73.12,87.38 76.05,90.3 76.05,94.44 77.72,96.1 77.72,101.03 81.86,105.18 KIT1.P$14
  Bottom 0.3: v75.75,72 76.1,72.35 R11.2 77.25,74.9 v77.25,80
FPGA-PROG  (via drill 0.35)
  Top 0.3: U1.1 79.25,53.85 v79.25,53.5 | KIT1.P$13 84.4,107.03 78.31,100.94 78.31,96.06 76.5,94.25 76.5,87.75 75.56,86.81 75.56,83.19 v78.25,80.5
  Bottom 0.3: R9.1 79.25,54.9 v79.25,53.5 79.75,53.5 82.25,56 82.25,57.5 79.25,60.5 79.25,79.5 v78.25,80.5
GND  (via drill 0.35, 1.02)
  Top 0.3: U1.90 v60.25,63.25 | U1.99 59.5,58.75 v60.75,60 | M1:U1.24 34.75,61 33.75,60 v33.75,56 | M1:U1.3 33.75,50.5 32.75,51.5 v32.75,54 | M1:U1.30 31.75,58.5 32.75,57.5 v32.75,56 | DD:U1.48 DD:U1.47 DD:U1.46 33.25,75 33.75,75.5 v33.75,79 33.75,78.5 33.25,78 DD:U1.40 | 37.7,33.05 39.58,34.92 41.08,34.92 v42,34 | 47.86,31.89 47,31.03 44.97,31.03 v43,33 45,31 45,29 43.24,27.24 M2:U1.46 M2:U1.47 M2:U1.48 46.16,26.53 M2:C1.2 | 46.34,33.91 46.1,33.67 46.1,33.66 45.75,33.31 45.5,33.07 44.43,33.07 v44,33.5 | S2.4 S2.5 S2.6 39.77,90.08 v40.05,89.8 | M4:U1.35 v105.25,63.5 | M4:U1.47 M4:U1.48 107,71 v106.25,71 106.25,71.35 M4:C1.2 | M4:U1.47 M4:U1.46 | M3:U1.46 102.28,36.97 | 102.28,36.97 M3:U1.48 | M3:U1.48 102.47,37.78 v101.75,38.5 102.25,39 102.3,39 M3:C10.2 | D2.C v61.5,4 D3.C v61.5,6.25 D4.C | U1.19 77.5,63.25 v77.25,63.5 | U1.27 77.5,67.25 77.25,67 v77.25,66.5 | U1.46 72.5,72.73 72.27,72.5 72.25,72.5 v71.75,72 | U1.37 v77,72 | U1.55 68,72.25 v67.75,72 | U1.61 v65,75 | U1.118 64,53.4 65,54.4 v65,54.5 | U1.127 v68.5,54 | U1.133 v71.5,54 | v69.25,26.5 69.25,26.78 68.4,27.63 U5.13 | R24.1 71.6,24.15 v71.25,24.5 | R4.2 94,92.65 v94,92.75 | C1.2 94.9,91.85 v94,92.75 | C3.2 76.9,40.5 v78.25,40.5 77.75,41 R8.2 | U1.11 77.5,59.25 v77.25,59.5 | C2.2 94,93.1 | 94,93.1 v94,92.75 | R2.2 94,93.1 | M3:U1.46 101.48,36.73 | 101.48,36.73 100.22,38 99.25,38 v97.25,36 97.97,36 99.36,34.61 | M3:U1.3 98.25,39.97 98.25,39 96.25,37 v96.25,36.5 | M3:U1.35 95.94,34.5 v95.25,34.5 94.4,33.65 | M3:U1.30 94.4,32.5 94.4,33.65 | M3:U1.8 96.25,38.43 96.25,38 v95.75,37.5 | M4:U1.8 102.75,66.5 103.25,66 v103.25,65.5 | M4:U1.40 105.75,66 v105.25,65.5 105.25,69 105.75,69.5 M4:U1.47